# Allegro board TinySDK-1312B-PCB.brd
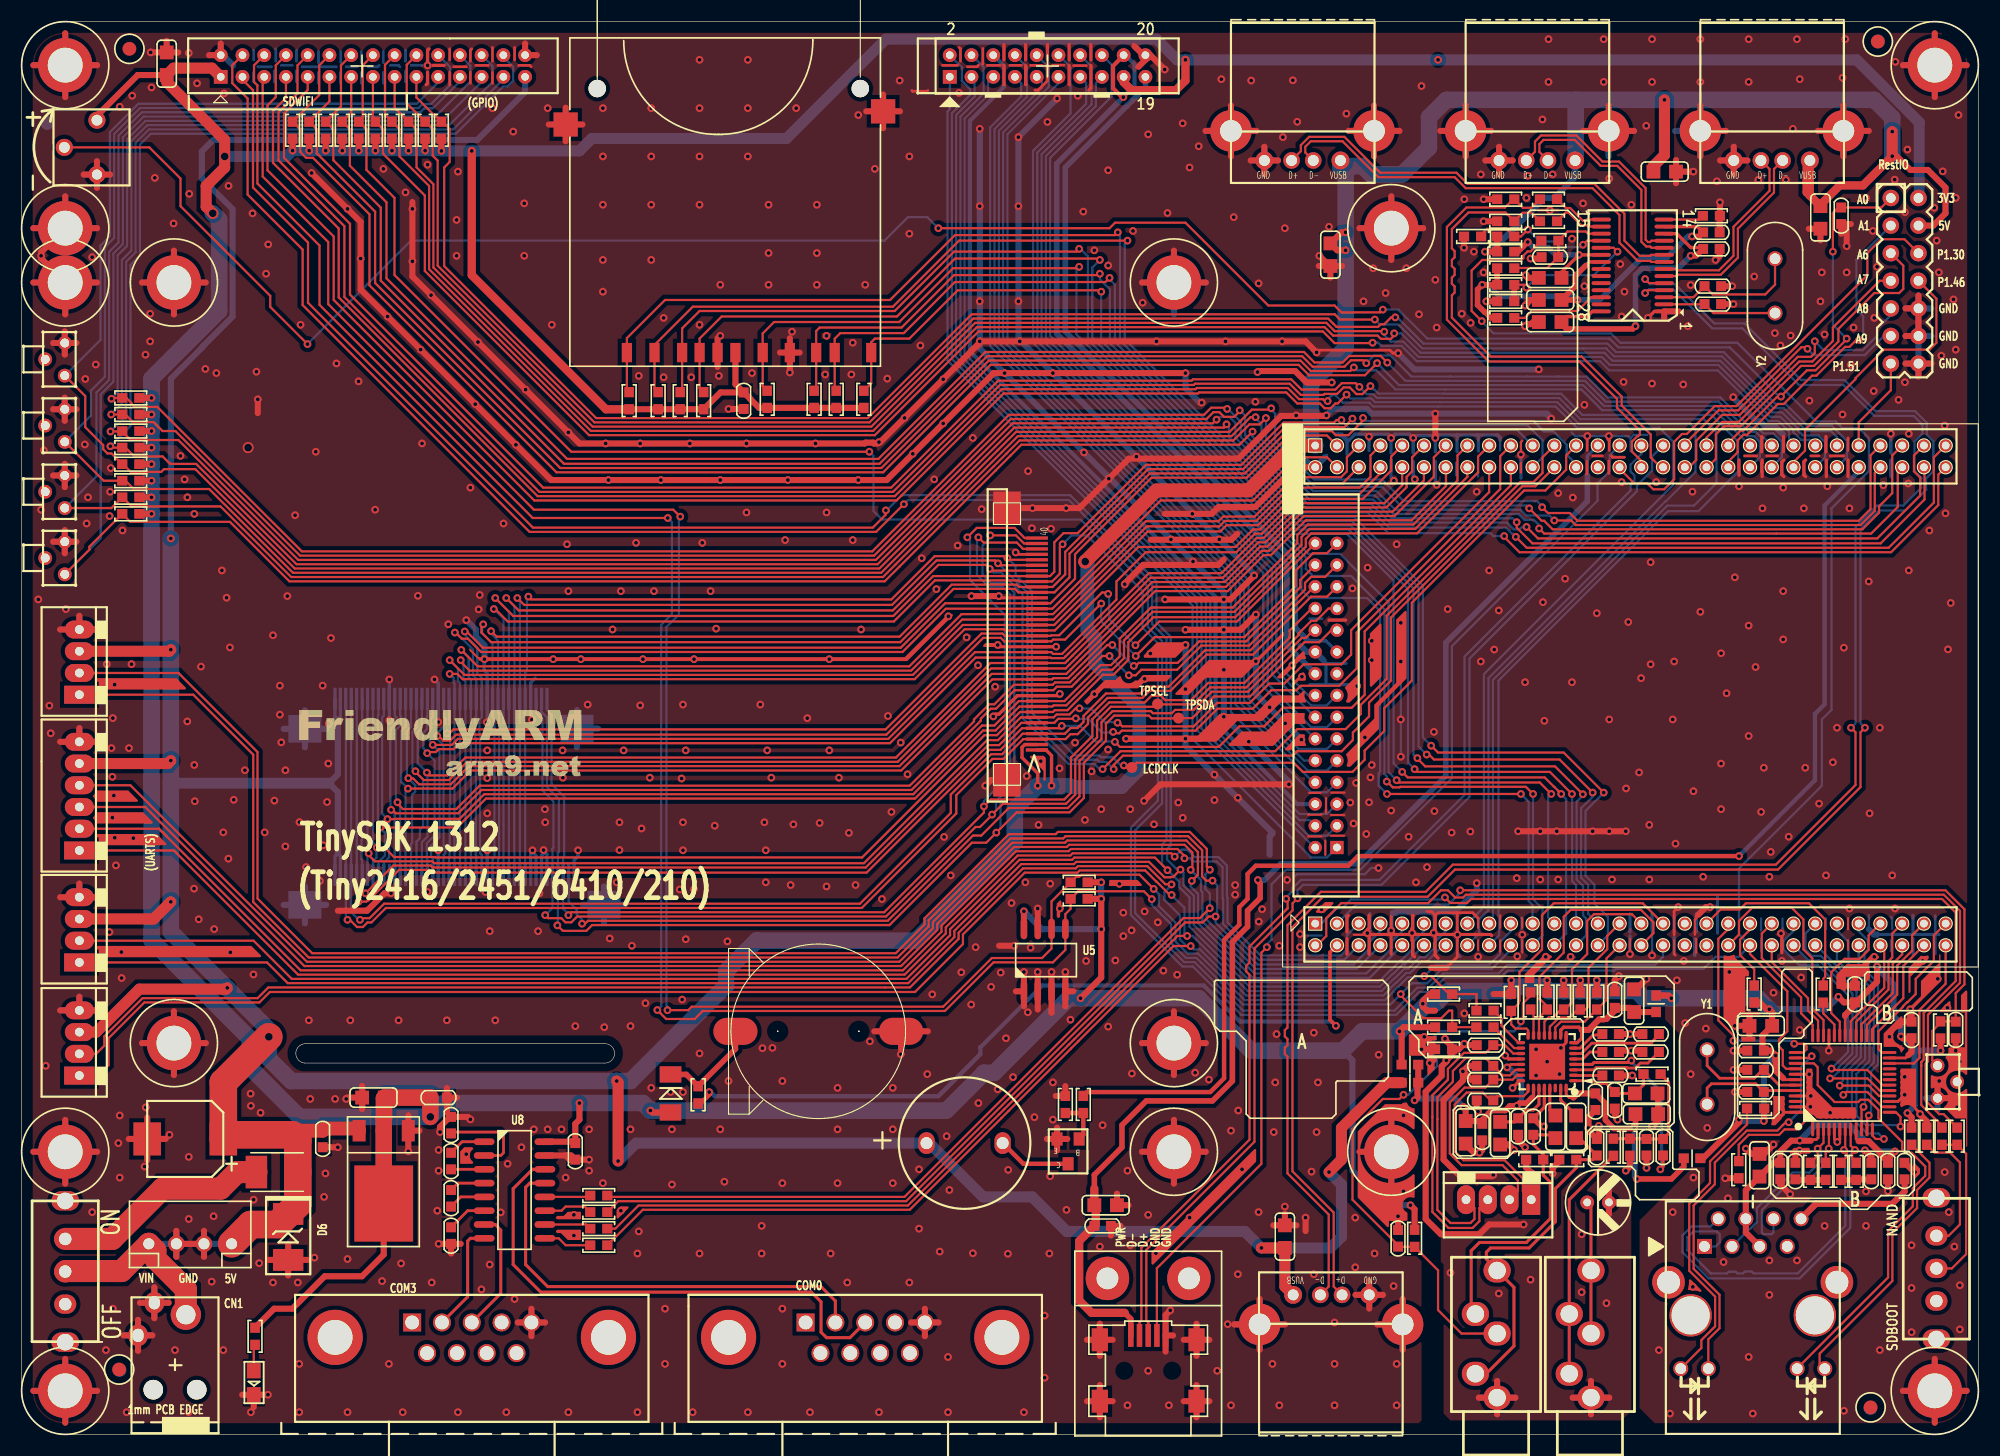
[diagram p0: board, top side]
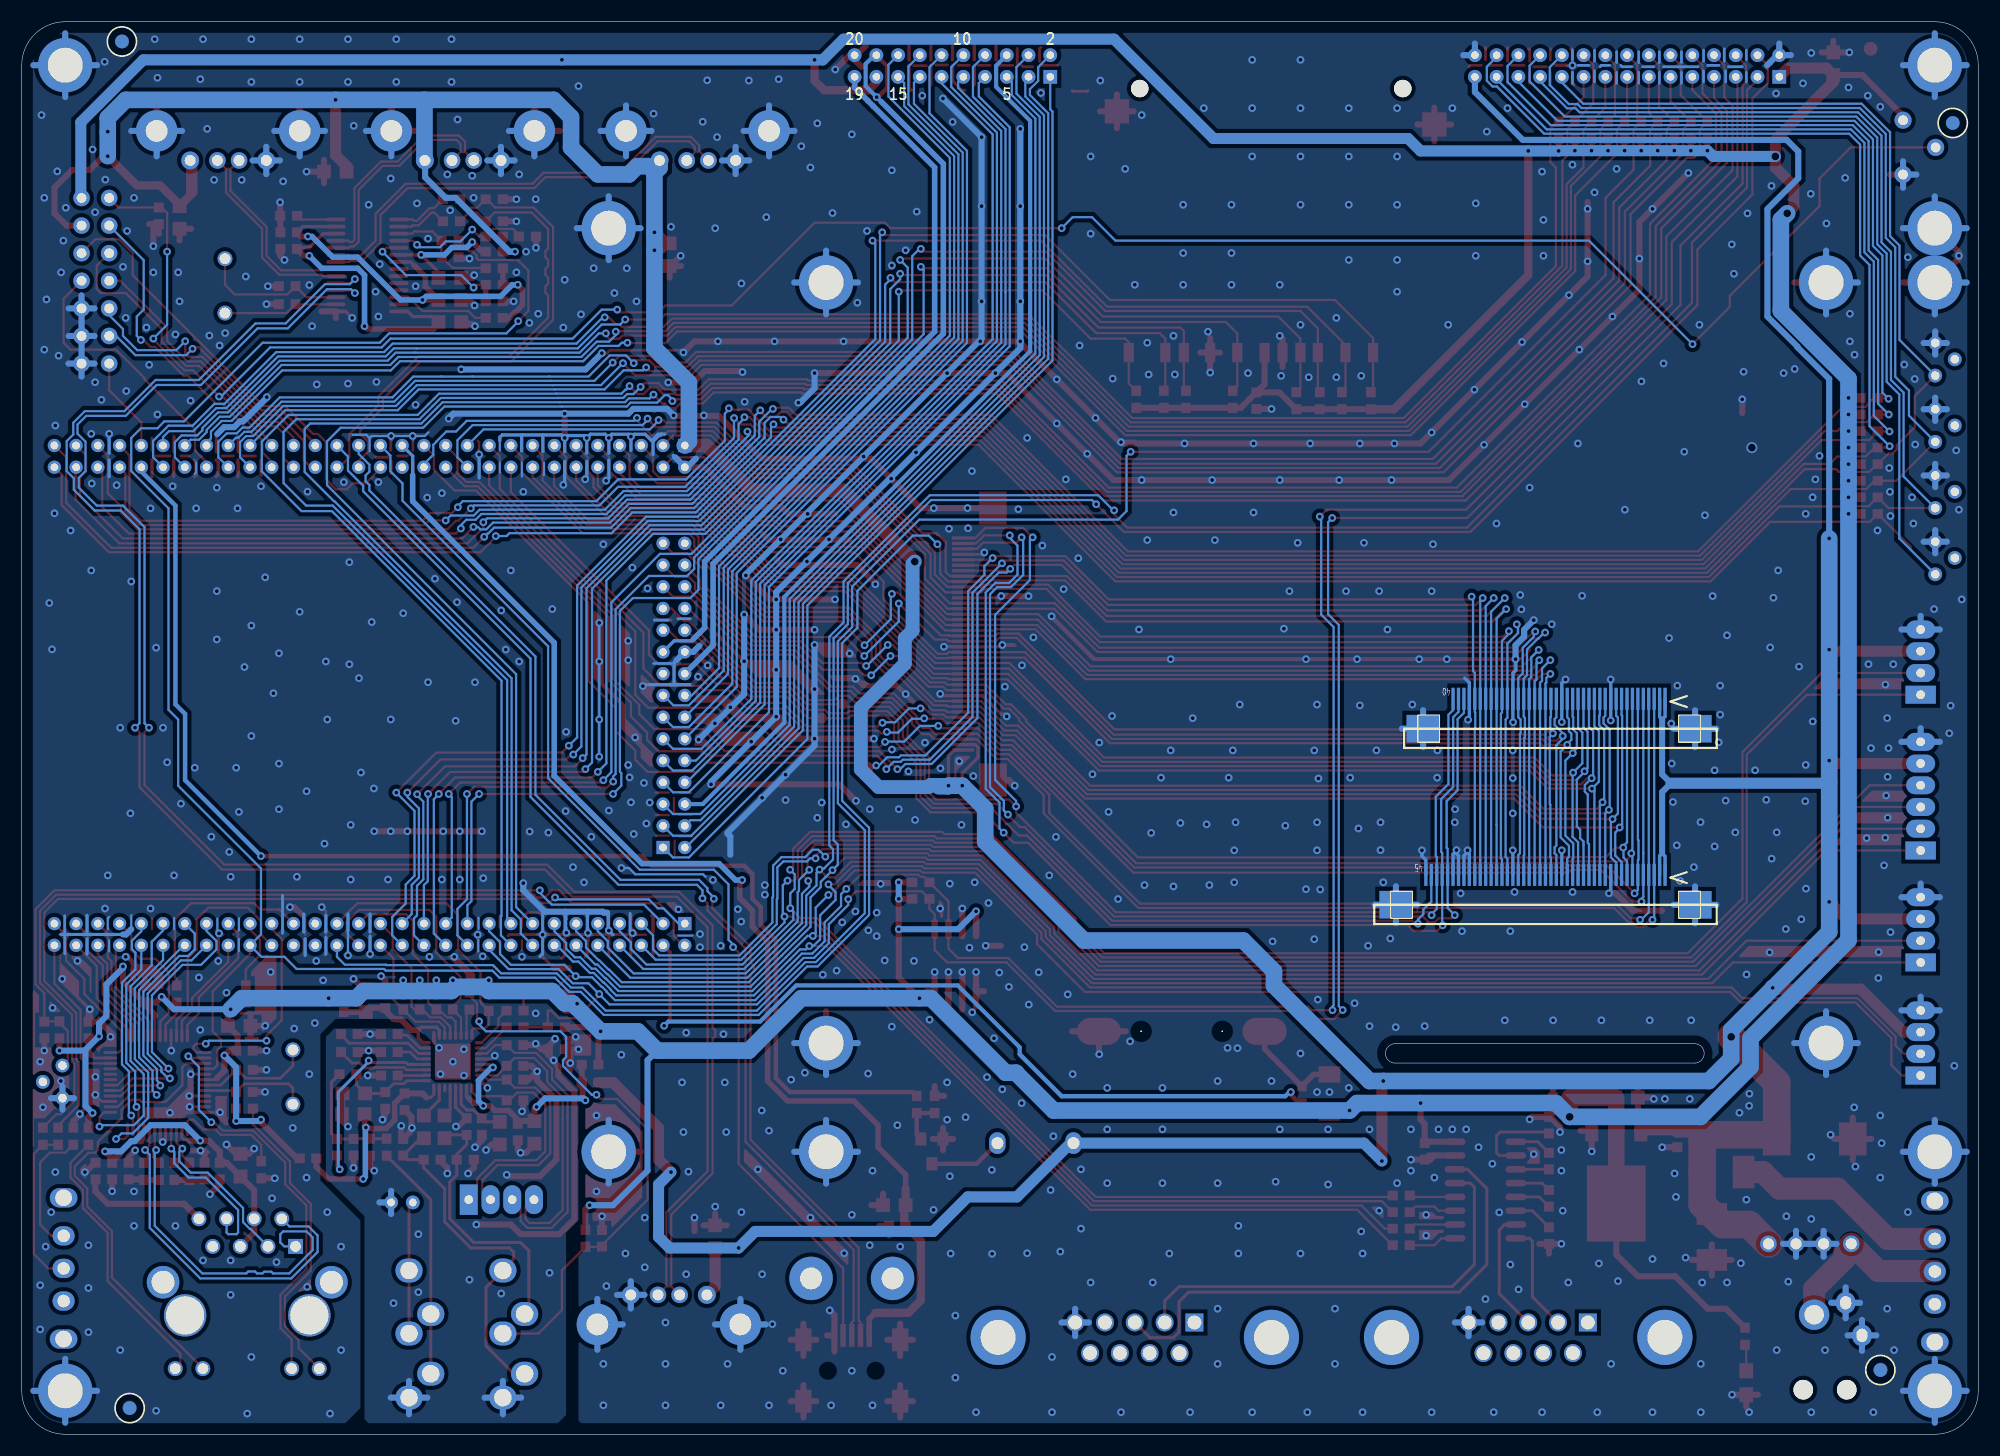
[diagram p1: board, bottom side, seen from below]

Outline 180 x 130 mm; copper layers: TOP, BOTTOM. Coordinates in mm from the lower left corner of the outline.
Outline path: 0,126 0,4 arc(1.17,1.17) 4,0 176,0 arc(178.83,1.17) 180,4 180,126 arc(178.83,128.83) 176,130 4,130 arc(1.17,128.83) 0,126 ; 26.01,35.94 53.57,35.94 arc(54.54,35.05) 53.57,34.16 26.01,34.16 arc(25.21,35.05) 26.01,35.94

## Design rules (mm)
net group DIFFPAIR38: nets XUHDM XUHDP
net group DIFFPAIR39: nets DM2- DP2+
net group DIFFPAIR40: nets DM3- DP3+
net group DIFFPAIR41: nets DM4- DP4+
net group DIFFPAIR42: nets N9742255 N9742303
net group DIFFPAIR51: nets SPK_OUT_RN SPK_OUT_RP
net group DIFFPAIR52: nets SPK_OUT_LN SPK_OUT_LP
net group PWR_PH: nets GND VDD_5V

## Placement (name value [footprint] x y rotation side)
BAT1  3V-Battery  [BAT600]  65.66 37.08 90 top
BUZZER1  Buzzer  [SPEAKER]  83.49 26.8 0 top
C8  220uF/16V  [CAPSOP]  18.54 27.18 180 top
C9  104  [C0603]  27.69 27.94 270 top
C10  10uF  [C0805]  33.4 30.99 180 top
C11  104  [C0603]  37.59 30.99 0 top
C12  104  [C0603]  177.93 37.97 270 top
C15  10uF  [C0805]  161.04 37.59 180 top
C16  104  [C0603]  173.86 36.45 90 top
C17  104  [C0603]  168.66 39.75 90 top
C18  104  [C0603]  160.27 35.31 180 top
C19  15pF  [C0603]  160.28 33.54 180 top
C20  15pF  [C0603]  160.28 31.51 180 top
C21  104  [C0603]  173.21 24.99 270 top
C22  10uF  [C0805]  159.88 23.72 90 top
C23  104  [C0603]  171.69 24.99 270 top
C24  104  [C0603]  161.78 24.99 270 top
C25  104  [C0603]  170.16 23.46 90 top
C26  104  [C0603]  163.18 23.46 90 top
C29  104  [C0603]  134.37 28.57 270 top
C30  10uF  [C0805]  132.84 28.83 270 top
C31  104  [C0603]  144.78 31.37 270 top
C32  10uF  [C0805]  148.46 29.46 0 top
C33  100pF  [C0603]  139.06 27.56 90 top
C34  100pF  [C0603]  144.91 25.65 90 top
C35  104  [C0603]  126.62 17.27 90 top
C36  1uF  [C0603]  151 27.18 270 top
C37  100pF  [C0603]  135.38 30.73 180 top
C38  100pF  [C0603]  135.38 32.64 180 top
C39  104  [C0603]  39.5 24.38 90 top
C40  104  [C0603]  39.5 29.21 270 top
C41  220pF  [C0603]  149.48 27.18 270 top
C42  1uF  [C0603]  149.1 35.18 0 top
C43  1uF  [C0603]  145.41 35.18 0 top
C44  1uF  [C0603]  145.41 33.02 0 top
C45  1uF  [C0603]  145.41 36.83 0 top
C46  1uF  [C0603]  150.62 36.83 180 top
C47  100pF  [C0603]  135.38 33.91 180 top
C48  100pF  [C0603]  135.38 35.81 180 top
C49  104  [C0603]  39.5 17.53 90 top
C50  104  [C0603]  146.56 39.24 90 top
C51  10uF  [C0805]  98.68 21.08 0 top
C52  104  [C0603]  98.68 19.18 0 top
C54  10uF  [C0805]  148.34 38.86 90 top
C55  10uF  [C0805]  143 29.34 270 top
C56  10uF  [C0805]  141.1 29.34 270 top
C57  10uF  [C0805]  136.02 26.67 90 top
C58  104  [C0603]  137.67 29.08 270 top
C59  10uF  [C0805]  150.5 31.37 180 top
C60  104  [C0603]  146.56 31.5 270 top
C61  104  [C0603]  39.5 22.48 270 top
C62  104  [C0603]  66.42 94.36 90 top
C64  104  [C0603]  167.39 112.9 270 top
C67  10uF  [C0805]  13.34 125.09 90 top
C68  104  [C0603]  50.93 26.8 270 top
C73  10uF  [C0805]  165.48 113.03 270 top
C74  10uF  [C0805]  120.4 109.6 270 top
C96  10uF  [C0805]  150.11 116.2 0 top
C97  10uF  [C0805]  116.21 17.15 90 top
C137  NC  [C0603]  154.81 104.01 0 top
C142  NC  [C0603]  154.81 105.66 0 top
C145  10uF  [C0805]  139.57 102.36 0 top
C146  104  [C0603]  156.21 109.09 180 top
C147  10uF  [C0805]  139.57 106.43 0 top
C153  10uF  [C0805]  139.57 104.39 0 top
C161  104  [C0603]  156.21 110.62 180 top
C162  104  [C0603]  141.35 108.33 180 top
CAMERA  SIP-2.0mm-10x2  [SDWIFI-NH]  94.38 125.93 0 top
CN1  -  [DC023B]  14.1 6.35 90 top
COM0  CONNECTOR DB9  [DB9RA_M]  77.6 10.29 90 top
COM3  CONNECTOR DB9  [DB9RA_M]  41.4 10.29 90 top
CON1  PH-4A  [SIP4-FA2]  5.3 66.98 90 top
CON2  PH-6A  [SIP6-FA2]  5.3 58.73 90 top
CON3  PH-4A  [SIP4-FA2]  5.3 42.35 90 top
CON4  PH-4A  [SIP4-FA2]  5.3 31.93 90 top
CON5  2510-4A  [CON4-B]  15.5 17.53 180 top
CON6  SIP-2.54mm-7x4  [SIP7X2-2]  173.23 106.16 270 top
CON10  SD/MMC CARD  [SDCARD]  58.05 118.1 90 top
CON12  PH-4A  [SIP4-FA]  139.96 21.59 180 top
CON13  SIP-2.0mm-15x2  [SIP30S]  27.31 125.93 0 top
D1  1N4148  [D1206]  59.68 29.61 90 top
D6  5.6V  [DO-214AA-SMB]  24.51 18.16 270 top
F1  3A  [F3528]  23.62 24.38 0 top
FB1  0R/NC  [L0603]  127.71 34.02 0 top
FB2  0R  [L0603]  153.67 25.4 180 top
FB3  0R  [L0603]  127.71 32.36 0 top
FB5  0R  [L0603]  150.37 39.62 270 top
H1  One-Hole  [H1]  4 4 0 top
H2  One-Hole  [H1]  4 126 0 top
H3  One-Hole  [H1]  176 126 0 top
H4  One-Hole  [H1]  176 4 0 top
H5  One-Hole  [H1]  4 26 0 top
H6  One-Hole  [H1]  106 26 0 top
H7  One-Hole  [H1]  4 106 0 top
H8  One-Hole  [H1]  4 111 0 top
H9  One-Hole  [H1]  14 36 0 top
H10  One-Hole  [H1]  14 106 0 top
H11  One-Hole  [H1]  106 36 0 top
H12  One-Hole  [H1]  126 26 0 top
H13  One-Hole  [H1]  106 106 0 top
H14  One-Hole  [H1]  126 111 0 top
ID1  ID-BOARD  [FM4P]  9 5.91 180 bottom
ID2  ID-BOARD  [FM4P]  170.76 128.18 0 top
ID3  ID-BOARD  [FM4P]  170.78 128.18 180 bottom
ID4  ID-BOARD  [FM4P]  170.09 2.48 0 top
ID5  ID-BOARD  [FM4P]  2.34 120.68 180 bottom
ID6  ID-BOARD  [FM4P]  9.91 127.51 0 top
ID7  ID-BOARD  [FM4P]  170.07 2.41 180 bottom
ID8  ID-BOARD  [FM4P]  8.96 5.96 0 top
K1  -  [KEY-A06]  2.16 98.93 270 top
K2  -  [KEY-A06]  2.16 92.84 270 top
K3  -  [KEY-A06]  2.16 86.74 270 top
K4  -  [KEY-A06]  2.16 80.64 270 top
LAN1  -  [HR911105A]  159.26 21.44 180 top
LCD1  FPC-P05-45P  [CON-FPC-P05-45P]  25.65 52.45 0 bottom
LCD2  FPC-P05-40P  [CON-FPC-P05-40P]  94.36 59.82 90 top
LCD3  FPC-P05-40P  [CON-FPC-P05-40P]  25.65 68.66 0 bottom
LCDCLK  Test-Point  [TPC1]  102.13 61.37 0 top
LED_3.3  RED  [LED]  21.34 5.84 270 top
MIC1  MIC  [MIC2]  144.02 21.34 0 top
MIC2  PhoneJack-Blue  [EARJACK5]  144.27 16.24 270 top
MINIUSB1  MiniUSB-AR  [MINIUSB_ANT]  103.63 5.84 0 top
NOREF  -  []  24.9 59.75 0 top
Q2  MMBT3904AL  [SOT-23-Q]  96.27 26.04 180 top
R1  0R  [R0603]  176.66 27.43 90 top
R2  0R  [R0603]  178.05 27.43 270 top
R3  0R  [R0603]  175.26 27.43 270 top
R4  1K  [R0603]  21.46 9.02 270 top
R5  10K  [R0603]  159.38 40.51 270 top
R6  1K  [R0603]  97.66 30.35 90 top
R7  0R  [R0603]  165.74 40.51 90 top
R8  6.8K,1%  [R0603]  157.97 24.35 270 top
R9  10K  [R0603]  97.28 50.8 180 top
R10  10K  [R0603]  97.28 49.28 180 top
R11  0R  [R0603]  62.23 31.24 270 top
R12  10K  [R0603]  26.44 120.02 270 top
R13  10K  [R0603]  29.49 120.02 270 top
R14  10K  [R0603]  32.54 120.02 270 top
R15  10K  [R0603]  176.53 37.21 270 top
R16  10K  [R0603]  96.01 30.35 270 top
R18  10K  [R0603]  35.59 120.02 270 top
R19  10K  [R0603]  38.61 120.02 270 top
R20  1K  [R0603]  159.51 29.98 180 top
R21  1K  [R0603]  173.86 27.43 270 top
R23  10K  [R0603]  27.97 120.02 90 top
R24  51R  [R0603]  167.37 24.2 270 top
R25  51R  [R0603]  168.77 24.2 270 top
R26  51R  [R0603]  164.57 24.2 270 top
R27  10K  [R0603]  24.92 120.02 90 top
R28  10K  [R0603]  31.01 120.02 90 top
R29  51R  [R0603]  165.97 24.2 270 top
R34  10K  [R0603]  34.06 120.02 90 top
R35  10K  [R0603]  10.03 89.28 0 top
R37  10K  [R0603]  10.03 87.76 0 top
R38  10K  [R0603]  58.55 95.12 270 top
R39  10K  [R0603]  10.03 86.23 0 top
R40  10K  [R0603]  10.03 84.71 0 top
R41  10K  [R0603]  68.58 95.25 270 top
R42  10K  [R0603]  60.58 95.12 270 top
R43  10K  [R0603]  10.03 95.38 180 top
R46  10K  [R0603]  142.24 25.27 0 top
R47  10K  [R0603]  139.19 25.27 0 top
R49  100K  [R0603]  128.14 18.03 90 top
R57  0R  [R0603]  134.62 38.99 0 top
R58  0R  [R0603]  134.62 37.47 0 top
R59  2.2K  [R0603]  149.99 33.15 180 top
R60  10K  [R0603]  37.11 120.02 90 top
R62  47K/NC  [R0603]  147.96 26.42 90 top
R63  0R  [R0603]  130.81 35.43 0 top
R64  10K  [R0603]  10.03 93.85 180 top
R65  10K  [R0603]  10.03 92.33 180 top
R66  10K  [R0603]  10.03 90.81 180 top
R67  100R  [R0603]  146.43 26.42 90 top
R71  10K  [R0603]  62.74 95.12 270 top
R72  10K  [R0603]  74.93 95.25 270 top
R73  10K  [R0603]  72.9 95.25 270 top
R74  10K  [R0603]  55.88 95.12 270 top
R75  0R  [R0603]  53.09 20.45 0 top
R76  0R  [R0603]  53.09 21.97 0 top
R77  10K  [R0603]  77.47 95.25 270 top
R78  0R  [R0603]  53.09 18.92 0 top
R79  0R  [R0603]  53.09 17.4 0 top
R92  0R  [R0603]  138.81 39.88 270 top
R103  2.7K,1%  [R0603]  155.45 112.14 0 top
R104  0R  [R0603]  140.46 111.63 180 top
R105  0R  [R0603]  140.46 113.67 180 top
R106  NC  [R0603]  140.59 109.86 180 top
R107  100K  [R0603]  136.53 107.31 180 top
R108  10K  [R0603]  136.53 110.24 0 top
R109  15K  [R0603]  136.53 113.67 0 top
R110  15K  [R0603]  136.53 111.63 0 top
R111  20K  [R0603]  133.48 110.24 180 top
R114  10K  [R0603]  136.53 105.79 0 top
R115  NC  [R0603]  136.53 104.27 180 top
R116  10K  [R0603]  136.53 102.74 180 top
R117  0R  [R0603]  136.53 108.84 180 top
R126  2.2K  [R0603]  130.81 37.47 180 top
R127  2.2K  [R0603]  130.81 40.51 180 top
R128  10K  [R0603]  137.03 39.75 90 top
R129  10K  [R0603]  140.34 39.88 90 top
R131  10K  [R0603]  141.86 39.88 90 top
R132  10K  [R0603]  143.38 39.88 90 top
R133  10K  [R0603]  144.91 39.88 90 top
RST  -  [KEY-A06]  178.05 32.44 90 top
S1  SW-DIP4  [SW35]  4 15 270 top
S2  SW-DIP4  [SW35]  176.15 15.24 90 top
SPK1  PhoneJack-Green  [EARJACK5]  135.64 16.24 270 top
TINYBOARD  TinyCore  [TINY6410_2]  116 43 0 top
TPSCL  Test-Point  [TPC1]  104.5 67.21 0 top
TPSDA  Test-Point  [TPC1]  106.43 65.91 0 top
U2  AMS1086CM-3.3  [TO-252]  35.56 27.94 180 top
U4  DM9000AEP  [LQFP48FA]  167.51 32.38 0 top
U5  AT24LC04  [SOP8]  92.2 40.77 90 top
U6  WM8960GEFL  [QFN32-19P7-TH]  140.34 34.29 180 top
U8  SP3232  [SOP16]  42.55 26.92 0 top
U52  FE1.1s  [TSSOP28-25P6X228]  148.21 107.57 90 top
USBH1  USB  A  [USB-A2]  164.5 117.23 0 top
USBH2  USB  A  [USB-A2]  142.91 117.23 0 top
USBH3  USB  A  [USB-A2]  116.97 12.83 180 top
USBH4  USB  A  [USB-A2]  121.32 117.23 0 top
W1  10K  [VR3_7X7]  5.92 117.3 90 top
Y1  25MHz  [OSC2PR-1]  155.06 35.32 270 top
Y2  12MHz  [OSC2PR-1]  161.3 103.25 90 top

## Library data of the parts
BAT1 = BATTERY_3
BUZZER1 = SPEAKER
C8 C10 C15 C22 C51 C67 = CAP
C9 C11 C12 C16-C21 C23-C26 C29-C50 C52 C54-C62 C64 C68 C73 C74 C96 C97 C137 C142 C145-C147 C153 C161 C162 = CAP NP
CAMERA = CON20A
CN1 = CON3_3
COM0 COM3 = CONNECTOR DB9_2
CON1 CON3-CON5 = CON4
CON2 = CON6
CON6 = CON14A
CON10 = SD_0
CON12 = J1X4_1
CON13 = CON20A_5
D1 = DIODE
D6 = DIODE ZENER1_8
F1 = FUSE
FB1-FB3 FB5 = INDUCTOR
H1-H14 = CON1
ID1-ID8 = ID-BOARD
K1-K4 RST = SW PUSHBUTTON_0
LAN1 = HR911105A
LCD1 = LCD-888_1
LCD2 LCD3 = LCD-888_2
LCDCLK TPSCL TPSDA = TP
LED_3.3 = LED
MIC1 = MIC
MIC2 SPK1 = PHONEJACK STEREO SW
MINIUSB1 = USB_A/B_2
Q2 = NPN-BEC
R1-R16 R18-R21 R23-R29 R34 R35 R37-R43 R46 R47 R49 R57-R60 R62-R67 R71-R79 R92 R103-R111 R114-R117 R126-R129 R131-R133 = R
S1 S2 = CON5
TINYBOARD = TinyCore
U2 = AMS1117
U4 = DM9000AEP
U5 = AT24LC04
U6 = WM8960GEFL_0
U8 = SP3232
U52 = CON28C_1
USBH1-USBH4 = USBPORT_0
W1 = RESISTOR VAR_0
Y1 Y2 = CRYSTAL

## Footprints (pads in the part's own frame, mm; a bottom-side part is the same pattern mirrored in y, then rotated)
BAT600
  oval 2.489x4.064 smd: 1(0,0) 2(0,-15.24)
  round 0.127 hole 1.194: 3(0,-3.886) 4(0,-11.354)
C0603
  rect 0.914x0.914 smd: 1(0,0) 2(1.524,0)
C0805
  rect 1.27x1.27 smd: 1(0,0) 2(2.083,0)
CAPSOP
  rect 2.54x3.048 smd: 1(0,0) 2(7,0)
CON4-B
  round 1.524 hole 1.016: 1(-3.81,0) 2(-1.27,0) 3(1.27,0) 4(3.81,0)
CON-FPC-P05-40P
  rect 0.305x2.032 smd: 1(3.16,0.968) 2(3.66,0.968) 3(4.16,0.968) 4(4.66,0.968) 5(5.16,0.968) 6(5.66,0.968) 7(6.161,0.968) 8(6.661,0.968) 9(7.161,0.968) 10(7.661,0.968) 11(8.161,0.968) 12(8.661,0.968) 13(9.161,0.968) 14(9.661,0.968) 15(10.162,0.968) 16(10.662,0.968) 17(11.162,0.968) 18(11.662,0.968) 19(12.162,0.968) 20(12.662,0.968) 21(13.162,0.968) 22(13.662,0.968) 23(14.163,0.968) 24(14.663,0.968) 25(15.163,0.968) 26(15.663,0.968) 27(16.163,0.968) 28(16.663,0.968) 29(17.163,0.968) 30(17.663,0.968) 31(18.164,0.968) 32(18.664,0.968) 33(19.164,0.968) 34(19.664,0.968) 35(20.164,0.968) 36(20.664,0.968) 37(21.164,0.968) 38(21.664,0.968) 39(22.165,0.968) 40(22.665,0.968)
  rect 3.048x2.54 smd: A(0.399,3.726) B(25.42,3.713)
CON-FPC-P05-45P
  rect 0.305x2.032 smd: 1(3.16,0.968) 2(3.66,0.968) 3(4.16,0.968) 4(4.66,0.968) 5(5.16,0.968) 6(5.66,0.968) 7(6.16,0.968) 8(6.661,0.968) 9(7.161,0.968) 10(7.661,0.968) 11(8.161,0.968) 12(8.661,0.968) 13(9.161,0.968) 14(9.661,0.968) 15(10.161,0.968) 16(10.662,0.968) 17(11.162,0.968) 18(11.662,0.968) 19(12.162,0.968) 20(12.662,0.968) 21(13.162,0.968) 22(13.662,0.968) 23(14.163,0.968) 24(14.663,0.968) 25(15.163,0.968) 26(15.663,0.968) 27(16.163,0.968) 28(16.663,0.968) 29(17.163,0.968) 30(17.663,0.968) 31(18.163,0.968) 32(18.664,0.968) 33(19.164,0.968) 34(19.664,0.968) 35(20.164,0.968) 36(20.664,0.968) 37(21.164,0.968) 38(21.664,0.968) 39(22.164,0.968) 40(22.665,0.968) 41(23.165,0.968) 42(23.665,0.968) 43(24.165,0.968) 44(24.665,0.968) 45(25.165,0.968)
  rect 3.048x2.54 smd: A(0.399,3.726) B(27.92,3.714)
D1206
  rect 1.5x2 smd: 1(0.009,-0.006) 2(3.51,-0.006)
DB9RA_M
  rect 1.651x1.651 hole 1.27: 1(0,5.486)
  round 1.651 hole 1.27: 2(0,2.743) 3(0,0) 4(0,-2.743) 5(0,-5.486) 6(-2.819,4.115) 7(-2.819,1.372) 8(-2.819,-1.372) 9(-2.819,-4.115)
  round 5.08 hole 3.2: 10(-1.372,12.573) 11(-1.372,-12.573)
DC023B
  round 1.803 hole 1.803 unplated: (-2.25,2) (-2.25,-2)
  round 2.794 hole 1.778: 1(4.65,-1)
  oval 1.981x1.778 hole 1.219x1.016: 2(5.75,1.9) 3(2.75,3.4)
DO-214AA-SMB
  rect 2.007x2.794 smd: 1(2.115,0) 2(-2.115,0)
EARJACK5
  oval 2.2x2.5 hole 1.6: 1(5.17,-1.903) 2(6.97,0.097) 3(1.17,0.097) 4(10.67,-1.903) 5(12.87,0.097)
F3528
  rect 1.981x2.997 smd: 1(-2.032,-0.254) 2(1.778,-0.254)
FM4P
  round 1.27 smd: 1(0,0)
H1
  round 5 hole 3.2: 1(0,0)
HR911105A
  round 3.9 hole 3.5 unplated: (-5.707,10.498) (5.723,10.498)
  rect 1.372x1.372 hole 0.991: 1(4.453,4.148)
  round 1.372 hole 0.991: 2(3.183,1.608) 3(1.913,4.148) 4(0.643,1.608) 5(-0.627,4.148) 6(-1.897,1.608) 7(-3.167,4.148) 8(-4.437,1.608) 9(6.633,15.398) 10(4.093,15.398) 11(-4.077,15.398) 12(-6.617,15.398)
  round 2.997 hole 2.1: M3(-7.737,7.448) M4(7.753,7.448)
KEY-A06
  round 1.27 hole 0.787: 1(1.5,1.8) 2(-1.5,1.8) 3(0,0)
L0603
  rect 0.94x0.889 smd: 1(-0.762,0) 2(0.762,0)
LED
  rect 1.4x1.27 smd: 1(-0.002,0.008) 2(2.207,0.008)
LQFP48FA
  oval 0.279x1.27 smd: 1(-2.75,-4.327) 2(-2.25,-4.327) 3(-1.75,-4.327) 4(-1.25,-4.327) 5(-0.75,-4.327) 6(-0.25,-4.327) 7(0.25,-4.327) 8(0.75,-4.327) 9(1.25,-4.327) 10(1.75,-4.327) 11(2.25,-4.327) 12(2.75,-4.327) 25(2.75,4.327) 26(2.25,4.327) 27(1.75,4.327) 28(1.25,4.327) 29(0.75,4.327) 30(0.25,4.327) 31(-0.25,4.327) 32(-0.75,4.327) 33(-1.25,4.327) 34(-1.75,4.327) 35(-2.25,4.327) 36(-2.75,4.327)
  oval 1.27x0.279 smd: 13(4.327,-2.75) 14(4.327,-2.25) 15(4.327,-1.75) 16(4.327,-1.25) 17(4.327,-0.75) 18(4.327,-0.25) 19(4.327,0.25) 20(4.327,0.75) 21(4.327,1.25) 22(4.327,1.75) 23(4.327,2.25) 24(4.327,2.75) 37(-4.327,2.75) 38(-4.327,2.25) 39(-4.327,1.75) 40(-4.327,1.25) 41(-4.327,0.75) 42(-4.327,0.25) 43(-4.327,-0.25) 44(-4.327,-0.75) 45(-4.327,-1.25) 46(-4.327,-1.75) 47(-4.327,-2.25) 48(-4.327,-2.75)
MIC2
  round 1.27 hole 0.711: 1(0,0) 2(2,0)
MINIUSB_ANT
  round 4 hole 2 unplated: (-3.75,8.5) (3.75,8.5)
  round 0 hole 0.889 unplated: (-2.2,0) (2.2,0)
  rect 0.508x2.108 smd: 1(-1.6,3.25) 2(-0.8,3.25) 3(0,3.25) 4(0.8,3.25) 5(1.6,3.25)
  rect 1.499x2.108 smd: 6(4.45,2.85) 7(-4.45,2.85) 8(-4.45,-2.8) 9(4.45,-2.8)
OSC2PR-1
  round 1.372 hole 0.991: 1(-0.064,0) 2(4.94,0)
QFN32-19P7-TH
  oval 0.813x0.305 smd: 1(-2.425,1.75) 2(-2.425,1.25) 3(-2.425,0.75) 4(-2.425,0.25) 5(-2.425,-0.25) 6(-2.425,-0.75) 7(-2.425,-1.25) 8(-2.425,-1.75) 17(2.425,-1.75) 18(2.425,-1.25) 19(2.425,-0.75) 20(2.425,-0.25) 21(2.425,0.25) 22(2.425,0.75) 23(2.425,1.25) 24(2.425,1.75)
  oval 0.305x0.813 smd: 9(-1.75,-2.425) 10(-1.25,-2.425) 11(-0.75,-2.425) 12(-0.25,-2.425) 13(0.25,-2.425) 14(0.75,-2.425) 15(1.25,-2.425) 16(1.75,-2.425) 25(1.75,2.425) 26(1.25,2.425) 27(0.75,2.425) 28(0.25,2.425) 29(-0.25,2.425) 30(-0.75,2.425) 31(-1.25,2.425) 32(-1.75,2.425)
  rect 3.302x3.302 smd: G1(0,0)
R0603
  rect 0.94x0.889 smd: 1(-0.787,0) 2(0.787,0)
SDCARD
  round 1.6 hole 1.6 unplated: (5.748,5.104) (5.748,-19.095)
  rect 1.778x0.94 smd: 1(-18.552,-0.168) 2(-18.552,-2.708) 3(-18.552,-5.967) 4(-18.552,-7.612) 5(-18.552,-10.119) 6(-18.552,-12.619) 7(-18.552,-15.039) 8(-18.552,-16.744) 9(-18.552,2.372) 10(-18.552,-20.104) 11(-18.552,-4.316)
  rect 2.235x2.235 smd: 12(2.438,8.009) 13(3.652,-21.199)
SDWIFI-NH
  rect 1.27x1.27 hole 0.7: 1(-9,-1)
  round 1.27 hole 0.7: 2(-9,1) 3(-7,-1) 4(-7,1) 5(-5,-1) 6(-5,1) 7(-3,-1) 8(-3,1) 9(-1,-1) 10(-1,1) 11(1,-1) 12(1,1) 13(3,-1) 14(3,1) 15(5,-1) 16(5,1) 17(7,-1) 18(7,1) 19(9,-1) 20(9,1)
SIP4-FA
  rect 1.651x2.8 hole 0.8: 1(1.08,0)
  oval 1.651x2.667 hole 0.8: 2(3.08,0) 3(5.08,0) 4(7.08,0)
SIP4-FA2
  rect 1.651x2.8 hole 0.8: 1(1.08,0)
  oval 1.651x2.667 hole 0.8: 2(3.08,0) 3(5.08,0) 4(7.08,0)
SIP6-FA2
  rect 1.651x2.8 hole 0.8: 1(-5,0)
  oval 1.651x2.667 hole 0.8: 2(-3,0) 3(-1,0) 4(1,0) 5(3,0) 6(5,0)
SIP7X2-2
  round 1.524 hole 0.889: 1(-7.62,-1.27) 2(-7.62,1.27) 3(-5.08,-1.27) 4(-5.08,1.27) 5(-2.54,-1.27) 6(-2.54,1.27) 7(0,-1.27) 8(0,1.27) 9(2.54,-1.27) 10(2.54,1.27) 11(5.08,-1.27) 12(5.08,1.27) 13(7.62,-1.27) 14(7.62,1.27)
SIP30S
  rect 1.27x1.27 hole 0.7: 1(-9,-1)
  round 1.27 hole 0.7: 2(-9,1) 3(-7,-1) 4(-7,1) 5(-5,-1) 6(-5,1) 7(-3,-1) 8(-3,1) 9(-1,-1) 10(-1,1) 11(1,-1) 12(1,1) 13(3,-1) 14(3,1) 15(5,-1) 16(5,1) 17(7,-1) 18(7,1) 19(9,-1) 20(9,1) 21(11,-1) 22(11,1) 23(13,-1) 24(13,1) 25(15,-1) 26(15,1) 27(17,-1) 28(17,1) 29(19,-1) 30(19,1)
SOP8
  oval 1.905x0.61 smd: 1(0,0) 2(0,-1.27) 3(0,-2.54) 4(0,-3.81) 5(5.74,-3.81) 6(5.74,-2.54) 7(5.74,-1.27) 8(5.74,0)
SOP16
  oval 1.905x0.61 smd: 1(0,0) 2(0,-1.27) 3(0,-2.54) 4(0,-3.81) 5(0,-5.08) 6(0,-6.35) 7(0,-7.62) 8(0,-8.89) 9(5.588,-8.89) 10(5.588,-7.62) 11(5.588,-6.35) 12(5.588,-5.08) 13(5.588,-3.81) 14(5.588,-2.54) 15(5.588,-1.27) 16(5.588,0)
SOT-23-Q
  rect 1.016x1.219 smd: B(-1.016,-1.143) C(0,1.143) E(1.016,-1.143)
SPEAKER
  oval 1.5x2 hole 1.1: 1(-0.254,0) 2(6.754,0)
SW35
  oval 1.778x2.54 hole 1.524: 1(-6.477,0) 5(6.523,0)
  oval 1.778x2.032 hole 1.143: 2(-2.977,0) 3(0.023,0) 4(3.023,0)
TINY6410_2
  rect 1.219x1.219 hole 0.711: A1(3,48) B1(3,4) C1(5,11)
  round 1.219 hole 0.711: A2(3,46) A3(5,48) A4(5,46) A5(7,48) A6(7,46) A7(9,48) A8(9,46) A9(11,48) A10(11,46) A11(13,48) A12(13,46) A13(15,48) A14(15,46) A15(17,48) A16(17,46) A17(19,48) A18(19,46) A19(21,48) A20(21,46) A21(23,48) A22(23,46) A23(25,48) A24(25,46) A25(27,48) A26(27,46) A27(29,48) A28(29,46) A29(31,48) A30(31,46) A31(33,48) A32(33,46) A33(35,48) A34(35,46) A35(37,48) A36(37,46) A37(39,48) A38(39,46) A39(41,48) A40(41,46) A41(43,48) A42(43,46) A43(45,48) A44(45,46) A45(47,48) A46(47,46) A47(49,48) A48(49,46) A49(51,48) A50(51,46) A51(53,48) A52(53,46) A53(55,48) A54(55,46) A55(57,48) A56(57,46) A57(59,48) A58(59,46) A59(61,48) A60(61,46) B2(3,2) B3(5,4) B4(5,2) B5(7,4) B6(7,2) B7(9,4) B8(9,2) B9(11,4) B10(11,2) B11(13,4) B12(13,2) B13(15,4) B14(15,2) B15(17,4) B16(17,2) B17(19,4) B18(19,2) B19(21,4) B20(21,2) B21(23,4) B22(23,2) B23(25,4) B24(25,2) B25(27,4) B26(27,2) B27(29,4) B28(29,2) B29(31,4) B30(31,2) B31(33,4) B32(33,2) B33(35,4) B34(35,2) B35(37,4) B36(37,2) B37(39,4) B38(39,2) B39(41,4) B40(41,2) B41(43,4) B42(43,2) B43(45,4) B44(45,2) B45(47,4) B46(47,2) B47(49,4) B48(49,2) B49(51,4) B50(51,2) B51(53,4) B52(53,2) B53(55,4) B54(55,2) B55(57,4) B56(57,2) B57(59,4) B58(59,2) B59(61,4) B60(61,2) C2(3,11) C3(5,13) C4(3,13) C5(5,15) C6(3,15) C7(5,17) C8(3,17) C9(5,19) C10(3,19) C11(5,21) C12(3,21) C13(5,23) C14(3,23) C15(5,25) C16(3,25) C17(5,27) C18(3,27) C19(5,29) C20(3,29) C21(5,31) C22(3,31) C23(5,33) C24(3,33) C25(5,35) C26(3,35) C27(5,37) C28(3,37) C29(5,39) C30(3,39)
TO-252
  rect 1.194x1.981 smd: 1(0,0) 2(2.261,0) 3(4.521,0)
  rect 5.41x7.01 smd: 4(2.261,6.706)
TPC1
  round 1 smd: 1(0,0)
TSSOP28-25P6X228
  oval 0.356x1.778 smd: 1(-4.227,-2.896) 2(-3.576,-2.896) 3(-2.926,-2.896) 4(-2.276,-2.896) 5(-1.626,-2.896) 6(-0.975,-2.896) 7(-0.325,-2.896) 8(0.325,-2.896) 9(0.975,-2.896) 10(1.626,-2.896) 11(2.276,-2.896) 12(2.926,-2.896) 13(3.576,-2.896) 14(4.227,-2.896) 15(4.227,2.896) 16(3.576,2.896) 17(2.926,2.896) 18(2.276,2.896) 19(1.626,2.896) 20(0.975,2.896) 21(0.325,2.896) 22(-0.325,2.896) 23(-0.975,2.896) 24(-1.626,2.896) 25(-2.276,2.896) 26(-2.926,2.896) 27(-3.576,2.896) 28(-4.227,2.896)
USB-A2
  round 1.651 hole 1: 1(0,0) 4(-7,0)
  round 1.524 hole 1: 2(-2.504,0) 3(-4.498,0)
  round 3.81 hole 2: 5(3.084,2.718) 6(-10.074,2.718)
VR3_7X7
  round 1.575 hole 0.9: 1(-1.36,-1) 2(3.64,-1) 3(1.14,2)

## Nets
AGND: C29.2 C30.2 C31.2 C32.2 C33.2 C34.2 C37.2 C38.2 C41.2 C42.1 C43.2 C44.2 C45.2 C46.2 C47.2 C48.2 C57.1 C58.2 C59.1 C60.2 MIC1.2 MIC2.5(E) R46.1 R47.1 R62.1 R63.2 SPK1.5(E) U6.20(SPKGND2) U6.24(SPKGND1) U6.28(AGND)
GND: BAT1.2(-) C8.2 C9.2 C10.2 C11.2 C12.2 C15.2 C16.2 C17.2 C18.2 C19.2 C20.2 C21.1 C22.2 C23.2 C24.2 C25.2 C26.2 C35.2 C40.1 C49.1 C50.2 C51.2 C52.2 C54.2 C62.1 C64.2 C67.2 C68.2 C73.2 C74.2 C96.2 C97.2 C137.2 C142.2 C145.1 C146.1 C147.1 C153.1 C161.1 C162.2 CAMERA.20 CN1.2 CN1.3 COM0.5 COM3.5 CON1.4 CON2.6 CON3.4 CON4.4 CON5.2 CON5.3 CON6.10 CON6.12 CON6.14 CON10.3(GND2) CON10.6(GND1) CON10.12(PAD1) CON10.13(PAD2) CON13.2 CON13.30 D6.1(A) H1.1 H2.1 H3.1 H4.1 H5.1 H6.1 H7.1 H8.1 H9.1 H10.1 H11.1 H12.1 H13.1 H14.1 K1.2 K2.2 K3.2 K4.2 LCD1.11(GND1) LCD1.20(GND2) LCD1.29(GND3) LCD1.37(GND4) LCD1.38(GND5) LCD1.39(GND6) LCD1.40(GND7) LCD1.45(GND8) LCD1.A LCD1.B LCD2.11(GND1) LCD2.20(GND2) LCD2.29(GND3) LCD2.37(SCL2) LCD2.A LCD2.B LCD3.11(GND1) LCD3.20(GND2) LCD3.29(GND3) LCD3.37(SCL2) LCD3.A LCD3.B LED_3.3.2(CATHODE) MINIUSB1.5(GND) MINIUSB1.6(#6) MINIUSB1.7(#7) MINIUSB1.8(#8) MINIUSB1.9(#9) Q2.E(EMITTER) R3.1 R8.2 R16.1 R63.1 R103.2 R109.1 R110.1 R111.2 R115.2 RST.2 TINYBOARD.A2 TINYBOARD.C20 U2.1(GND) U4.5(AGND2) U4.6(AGND3) U4.15(GND) U4.33(GND2) U4.41(TEST) U4.45(GND1) U4.47(AGND1) U4.48(BGGND) U5.1(A0) U5.2(A1) U5.3(A2) U5.4(GND) U5.7(WP) U6.9(DGND) U6.G1(GND_PADDLE) U8.15(VSS) U52.1(VSS) USBH1.4(GND1) USBH1.5(GND3) USBH1.6(GND2) USBH2.4(GND1) USBH2.5(GND3) USBH2.6(GND2) USBH3.4(GND1) USBH3.5(GND3) USBH3.6(GND2) USBH4.4(GND1) USBH4.5(GND3) USBH4.6(GND2) W1.1(A)
GND_EARTH: C21.2 LAN1.8(CHS_GND)
VBAT: BAT1.1(+) D1.2(K) R11.1
VDD_3.3V: C10.1 C11.1 C15.1 C16.1 C17.1 C18.1 C62.2 C67.1 C68.1 CAMERA.17 CON6.2 CON10.4(VDD) CON13.1 D1.1(A) FB1.1 FB2.1 FB5.1 R4.1 R5.2 R9.1 R10.1 R12.2 R13.2 R14.2 R15.2 R18.2 R19.2 R20.1 R21.1 R23.1 R27.1 R28.1 R34.1 R35.2 R37.2 R38.2 R39.2 R40.2 R41.2 R42.2 R43.1 R49.2 R60.1 R64.1 R65.1 R66.1 R71.2 R72.2 R73.2 R74.2 R77.2 R126.2 R127.2 R128.2 R129.2 R131.2 R132.2 R133.2 U2.2(VOUT) U2.4(TAB) U4.23(VDD1) U4.30(VDD2) U4.42(VDD3) U5.8(VDD) U8.16(VDD) W1.2(B)
VDD_5V: BUZZER1.1 C8.1 C9.1 C73.1 C74.1 C96.1 C97.1 CON1.3 CON2.5 CON3.3 CON4.3 CON5.1 CON6.4 CON13.29 D6.2(K) F1.2 FB3.1 LCD1.1(VDD5V_1) LCD1.2(VDD5V_2) LCD2.1(VDD5V_1) LCD2.2(VDD5V_2) LCD3.1(VDD5V_1) LCD3.2(VDD5V_2) R108.1 R117.2 TINYBOARD.A1 U2.3(VIN) USBH1.1(VBUS) USBH2.1(VBUS) USBH3.1(VBUS) USBH4.1(VBUS)
VDD_AUDIO_A3.3V: C31.1 C32.1 FB2.2 U6.32(AVDD)
VDD_AUDIO_D3.3V: C50.1 C54.1 FB5.2 U6.8(DCVDD) U6.10(DBVDD)
VDD_AUDIO_SPK: C29.1 C30.1 FB1.2 FB3.2 U6.21(SPKVDD2) U6.26(SPKVDD1)
VDD_CAM_1.8V: CAMERA.19 TINYBOARD.C19
VDD_CAM_2.5V: CAMERA.18 TINYBOARD.C18
VDD_IN: CN1.1 CON5.4 S1.3
VDD_RTC_AP: R11.2 TINYBOARD.B4
VDD_USB_1.8V: C145.2 C146.2 U52.12(VD18_O) U52.28(VD18)
VDD_USB_3.3V: C153.2 C161.2 R107.2 R114.1 R116.2 U52.13(VD33) U52.21(VD33_O)
AUDIO_XI2SCDCLK0: R133.1 TINYBOARD.B30 U6.11(MCLK)
AUDIO_XI2SLRCK0: R131.1 TINYBOARD.B31 U6.13(DACLRC)
AUDIO_XI2SSCLK0: R132.1 TINYBOARD.B29 U6.12(BCLK)
AUDIO_XI2SSDI0: R128.1 TINYBOARD.B33 U6.16(ADCDAT)
AUDIO_XI2SSDO0_0: R129.1 TINYBOARD.B32 U6.14(DATDAT)
CAM_A_RESET: CAMERA.4 TINYBOARD.C4
CAM_SCL0: CAMERA.2 TINYBOARD.C2
CAM_SDA0: CAMERA.1 TINYBOARD.C1
CAMERA_A_GPIO2: CAMERA.3 TINYBOARD.C3
DM1-: U52.8(DM2) USBH4.2(D-)
DM2-: U52.4(DM4) USBH3.2(D-)
DM3-: U52.6(DM3) USBH1.2(D-)
DM4-: U52.10(DM1) USBH2.2(D-)
DM9000_RX+: LAN1.3(RX+) R26.1 U4.3(RX+)
DM9000_RX-: LAN1.6(RX-) R29.1 U4.4(RX-)
DM9000_TX+: LAN1.1(TD+) R24.1 U4.7(TX+)
DM9000_TX-: LAN1.2(TD-) R25.1 U4.8(TX-)
DP1+: U52.9(DP2) USBH4.3(D+)
DP2+: U52.5(DP4) USBH3.3(D+)
DP3+: U52.7(DP3) USBH1.3(D+)
DP4+: U52.11(DP1) USBH2.3(D+)
EARPHONE_DETECT: C35.1 R49.1 R92.1 SPK1.2(B)
LANLED: LAN1.11(LEDY-) U4.39(LED1)
LINKLED: LAN1.10(LEDG-) U4.38(LED2)
M_NRESET: C12.1 R15.1 RST.1 TINYBOARD.B3
MICBIAS: C59.2 C60.1 R59.2 U6.1(MICBIAS)
NET_AVDD25: C22.1 C23.1 C24.1 LAN1.4(CT2) LAN1.5(CT1) U4.2(AVDD25_2) U4.9(AVDD25_1)
NWAIT: R5.1 TINYBOARD.B41
OM1: R1.2 TINYBOARD.B1
RSRXD0: COM0.2 U8.13(RIN1)
RSRXD3: COM3.2 U8.8(RIN2)
RSTXD0: COM0.3 U8.14(T1OUT)
RSTXD3: COM3.3 U8.7(T2OUT)
SPK_OUT_LN: C38.1 CON12.2 U6.23(SPK_LN)
SPK_OUT_LP: C37.1 CON12.1 U6.25(SPK_LP)
SPK_OUT_RN: C48.1 CON12.3 U6.19(SPK_RN)
SPK_OUT_RP: C47.1 CON12.4 U6.22(SPK_RP)
WIFI0_PD_GPIO: CON13.11 R12.1 TINYBOARD.A41
WIFI0_RESET_GPIO: CON13.12 R27.2 TINYBOARD.A42
XADCAIN0: C64.1 CON6.1 TINYBOARD.A39 W1.3(WIPER)
XADCAIN1: CON6.3 TINYBOARD.A40
XADCAIN6_YM: CON6.5 TINYBOARD.A38
XADCAIN7_YP: CON6.7 TINYBOARD.A37
XADCAIN8_XM: CON6.9 TINYBOARD.A36
XADCAIN9_XP: CON6.11 TINYBOARD.A35
XCICLKENB: CAMERA.5 TINYBOARD.C5
XCIHREF: CAMERA.6 TINYBOARD.C6
XCIPCLK: CAMERA.8 TINYBOARD.C8
XCIVSYNC: CAMERA.7 TINYBOARD.C7
XCIYDATA0: CAMERA.16 TINYBOARD.C16
XCIYDATA1: CAMERA.15 TINYBOARD.C15
XCIYDATA2: CAMERA.14 TINYBOARD.C14
XCIYDATA3: CAMERA.13 TINYBOARD.C13
XCIYDATA4: CAMERA.12 TINYBOARD.C12
XCIYDATA5: CAMERA.11 TINYBOARD.C11
XCIYDATA6: CAMERA.10 TINYBOARD.C10
XCIYDATA7: CAMERA.9 TINYBOARD.C9
XDACOUT: CON6.13 TINYBOARD.A51
XEINT6_SD0_NWP: CON10.10(WP) R77.1 TINYBOARD.B24
XEINT7: TINYBOARD.B40 U4.34(INT)
XEINT8: CON6.6 TINYBOARD.A30
XEINT9: CON13.16 R28.2 TINYBOARD.B34
XEINT10: LCD1.31(EINT10) LCD2.31(EINT10) LCD3.31(EINT10) TINYBOARD.A22
XEINT11: CON6.8 TINYBOARD.A46
XEINT14: LCD1.43(EINT14) LCD2.40(EINT15) LCD3.40(EINT15) TINYBOARD.C24
XEINT15: LCD1.44(EINT15) TINYBOARD.C22
XEINT16/KP_COL0: CON13.21 K1.1 R35.1 TINYBOARD.A53
XEINT17/KP_COL1: CON13.22 K2.1 R37.1 TINYBOARD.A54
XEINT18/KP_COL2: CON13.23 K3.1 R39.1 TINYBOARD.A55
XEINT19/KP_COL3: CON13.24 K4.1 R40.1 TINYBOARD.A56
XEINT24/KP_ROW0: CON13.25 R43.2 TINYBOARD.A57
XEINT25/KP_ROW1: CON13.26 R64.2 TINYBOARD.A58
XEINT26/KP_ROW2: CON13.27 R65.2 TINYBOARD.A59
XEINT27/KP_ROW3: CON13.28 R66.2 TINYBOARD.A60
XI2CSCL0: CON13.5 R9.2 R57.1 R127.1 TINYBOARD.B19 U5.6(SCL)
XI2CSCL2/IEM_SPWI: LCD1.41(SCL2) LCD2.38(EINT14) LCD3.38(EINT14) TINYBOARD.C23 TPSCL.1
XI2CSDA0: CON13.6 R10.2 R58.1 R126.1 TINYBOARD.B20 U5.5(SDA)
XI2CSDA2/IEM_SCLK: LCD1.42(SDA2) LCD2.39(SDA2) LCD3.39(SDA2) TINYBOARD.C21 TPSDA.1
XM0ADDR0: TINYBOARD.B35
XM0ADDR1: TINYBOARD.B36
XM0ADDR2: R7.2 TINYBOARD.B37
XM0ADDR3: TINYBOARD.B38
XM0CSN1: TINYBOARD.B39 U4.37(CS#)
XM0DATA0: TINYBOARD.B45 U4.18(SD0)
XM0DATA1: TINYBOARD.B46 U4.17(SD1)
XM0DATA2: TINYBOARD.B47 U4.16(SD2)
XM0DATA3: TINYBOARD.B48 U4.14(SD3)
XM0DATA4: TINYBOARD.B49 U4.13(SD4)
XM0DATA5: TINYBOARD.B50 U4.12(SD5)
XM0DATA6: TINYBOARD.B51 U4.11(SD6)
XM0DATA7: TINYBOARD.B52 U4.10(SD7)
XM0DATA8: TINYBOARD.B53 U4.31(SD8)
XM0DATA9: TINYBOARD.B54 U4.29(SD9)
XM0DATA10: TINYBOARD.B55 U4.28(SD10)
XM0DATA11: TINYBOARD.B56 U4.27(SD11)
XM0DATA12: TINYBOARD.B57 U4.26(SD12)
XM0DATA13: TINYBOARD.B58 U4.25(SD13)
XM0DATA14: TINYBOARD.B59 U4.24(SD14)
XM0DATA15: TINYBOARD.B60 U4.22(SD15)
XM0OEN: TINYBOARD.B44 U4.35(IOR#)
XM0WEN: TINYBOARD.B43 U4.36(IOW#)
XMMC0CDN: CON10.11(NCD) R71.1 TINYBOARD.B23
XMMC0DATA0: CON10.7(DAT0) R73.1 TINYBOARD.B25
XMMC0DATA1: CON10.8(DAT1) R72.1 TINYBOARD.B26
XMMC0DATA2: CON10.9(DAT2) R74.1 TINYBOARD.B27
XMMC0DATA3: CON10.1(CD/DAT3) R38.1 TINYBOARD.B28
XMMC2CDN/SPI_MISO2: CON13.15 R14.1 TINYBOARD.A45
XMMC2CLK/SPI_CLK2: CON13.13 R13.1 TINYBOARD.A43
XMMC2CMD/SPI_CSN2: CON13.14 R23.2 TINYBOARD.A44
XMMC2DATA0/SPI_MOSI2: CON13.17 R18.1 TINYBOARD.A47
XMMC2DATA1: CON13.18 R34.2 TINYBOARD.A48
XMMC2DATA2: CON13.19 R19.1 TINYBOARD.A49
XMMC2DATA3: CON13.20 R60.2 TINYBOARD.A50
XMMCCLK0: CON10.5(CLK) R41.1 TINYBOARD.B21
XMMCCMD0: CON10.2(CMD) R42.1 TINYBOARD.B22
XNRSTOUT: LCD1.32(NRESET) LCD2.32(NRESET) LCD3.32(NRESET) R106.2 TINYBOARD.B42 U4.40(PWRST#)
XPWMTOUT0: R6.2 TINYBOARD.A52
XPWMTOUT1: LCD1.30(TOUT1) LCD2.30(TOUT1) LCD3.30(TOUT1) TINYBOARD.A26
XSPICKL1: CON13.9 TINYBOARD.B17
XSPICS1: CON13.10 TINYBOARD.B18
XSPIMISO1: CON13.8 TINYBOARD.B16
XSPIMOSI1: CON13.7 TINYBOARD.B15
XUCTSN1: CON2.2 TINYBOARD.B6
XUHDM: R105.2 R109.2 TINYBOARD.A32
XUHDP: R104.2 R110.2 TINYBOARD.A34
XUODM: MINIUSB1.2(D-) TINYBOARD.A31
XUODP: MINIUSB1.3(D+) TINYBOARD.A33
XUODRVVBUS: TINYBOARD.A28
XUOID: MINIUSB1.4(ID) TINYBOARD.A29
XUOVBUS: C51.1 C52.1 MINIUSB1.1(VBUS) TINYBOARD.A27
XURTSN1: CON2.1 TINYBOARD.B5
XURXD0: CON1.2 R76.2 TINYBOARD.B8
XURXD1: CON2.4 TINYBOARD.B10
XURXD2: CON3.2 CON13.4 TINYBOARD.B12
XURXD3: CON4.2 R79.2 TINYBOARD.B14
XUTXD0: CON1.1 R75.2 TINYBOARD.B7
XUTXD1: CON2.3 TINYBOARD.B9
XUTXD2: CON3.1 CON13.3 TINYBOARD.B11
XUTXD3: CON4.1 R78.2 TINYBOARD.B13
XVHSYNC: LCD1.35(HSYNC) LCD2.35(HSYNC) LCD3.35(HSYNC) TINYBOARD.A24
XVVCLK: LCD1.36(VCLK) LCD2.36(VCLK) LCD3.36(VCLK) LCDCLK.1 TINYBOARD.A25
XVVD0: LCD1.3(VD0) LCD2.3(VD0) LCD3.3(VD0) TINYBOARD.C25
XVVD1: LCD1.4(VD1) LCD2.4(VD1) LCD3.4(VD1) TINYBOARD.C26
XVVD2: LCD1.5(VD2) LCD2.5(VD2) LCD3.5(VD2) TINYBOARD.A20
XVVD3: LCD1.6(VD3) LCD2.6(VD3) LCD3.6(VD3) TINYBOARD.A19
XVVD4: LCD1.7(VD4) LCD2.7(VD4) LCD3.7(VD4) TINYBOARD.A18
XVVD5: LCD1.8(VD5) LCD2.8(VD5) LCD3.8(VD5) TINYBOARD.A17
XVVD6: LCD1.9(VD6) LCD2.9(VD6) LCD3.9(VD6) TINYBOARD.A16
XVVD7: LCD1.10(VD7) LCD2.10(VD7) LCD3.10(VD7) TINYBOARD.A15
XVVD8: LCD1.12(VD8) LCD2.12(VD8) LCD3.12(VD8) TINYBOARD.C27
XVVD9: LCD1.13(VD9) LCD2.13(VD9) LCD3.13(VD9) TINYBOARD.C28
XVVD10: LCD1.14(VD10) LCD2.14(VD10) LCD3.14(VD10) TINYBOARD.A14
XVVD11: LCD1.15(VD11) LCD2.15(VD11) LCD3.15(VD11) TINYBOARD.A13
XVVD12: LCD1.16(VD12) LCD2.16(VD12) LCD3.16(VD12) TINYBOARD.A12
XVVD13: LCD1.17(VD13) LCD2.17(VD13) LCD3.17(VD13) TINYBOARD.A11
XVVD14: LCD1.18(VD14) LCD2.18(VD14) LCD3.18(VD14) TINYBOARD.A10
XVVD15: LCD1.19(VD15) LCD2.19(VD15) LCD3.19(VD15) TINYBOARD.A9
XVVD16: LCD1.21(VD16) LCD2.21(VD16) LCD3.21(VD16) TINYBOARD.C29
XVVD17: LCD1.22(VD17) LCD2.22(VD17) LCD3.22(VD17) TINYBOARD.C30
XVVD18: LCD1.23(VD18) LCD2.23(VD18) LCD3.23(VD18) TINYBOARD.A8
XVVD19: LCD1.24(VD19) LCD2.24(VD19) LCD3.24(VD19) TINYBOARD.A7
XVVD20: LCD1.25(VD20) LCD2.25(VD20) LCD3.25(VD20) TINYBOARD.A6
XVVD21: LCD1.26(VD21) LCD2.26(VD21) LCD3.26(VD21) TINYBOARD.A5
XVVD22: LCD1.27(VD22) LCD2.27(VD22) LCD3.27(VD22) TINYBOARD.A4
XVVD23: LCD1.28(VD23) LCD2.28(VD23) LCD3.28(VD23) TINYBOARD.A3
XVVDEN: LCD1.33(VDEN) LCD2.33(VDEN) LCD3.33(VDEN) TINYBOARD.A21
XVVSYNC: LCD1.34(VSYNC) LCD2.34(VSYNC) LCD3.34(VSYNC) TINYBOARD.A23
N490506: R57.2 U6.17(SCLK)
N490846: R58.2 U6.18(SDIN)
N563338: C46.1 U6.6(RINPUT2)
N563659: C45.1 U6.7(RINPUT3/JD3)
N565258: C44.1 U6.2(LINPUT3/JD2)
N570115: C43.1 U6.5(RINPUT1)
N579751: C36.2 U6.4(LINPUT1)
N580413: C36.1 C41.1 R59.1 R62.2 R67.2
N605417: C34.1 C55.2 R46.2 SPK1.3(C) SPK1.4(D)
N617320: C33.1 C56.2 R47.2 SPK1.1(A)
N3676300: R1.1 R2.2 S2.3
N3676952: R2.1 TINYBOARD.B2
N3684154: R3.2 S2.4
N3780125: F1.1 S1.2
N3805887: LED_3.3.1(ANODE) R4.2
N3869369: R7.1 U4.32(CMD)
N3921053: C19.1 U4.43(X2) Y1.1
N3921204: C20.1 U4.44(X1) Y1.2
N3925254: R8.1 U4.1(BGRES)
N3968686: C25.1 R24.2 R25.2
N3970814: C26.1 R26.2 R29.2
N3982722: LAN1.9(LEDG+) R20.2
N3983324: LAN1.12(LEDY+) R21.2
N4027687: Q2.B(BASE) R6.1 R16.2
N4771984: C42.2 U6.3(LINPUT2)
N5234173: R92.2 U6.15(ADCLRC/GPIO1)
N5390728: C55.1 U6.31(HP_L)
N5390947: C56.1 U6.29(HP_R)
N5424123: C57.2 C58.1 U6.27(VMID)
N6088771: R76.1 U8.12(ROUT1)
N6088773: R78.1 U8.10(T2IN)
N6088775: R79.1 U8.9(ROUT2)
N6095373: C39.2 U8.1(C1+)
N6095738: C39.1 U8.3(C1-)
N6103030: C40.2 U8.2(V+)
N6103395: C49.2 U8.6(V-)
N6105619: C61.1 U8.4(C2+)
N6105986: C61.2 U8.5(C2-)
N6195963: BUZZER1.2 Q2.C(COLLECTOR)
N9633247: MIC2.1(A) MIC2.4(D) R67.1
N9633353: MIC1.1 MIC2.2(B) MIC2.3(C)
N9742067: C137.1 U52.2(XOUT) Y2.1
N9742085: C142.1 U52.3(XIN) Y2.2
N9742255: R105.1 U52.15(DMU)
N9742263: R103.1 U52.14(REXT)
N9742303: R104.1 U52.16(DPU)
N9742345: C162.1 R106.1 R107.1 U52.17(XRSTJ)
N9742489: R108.2 R111.1 U52.18(VBUSM)
N9742525: R114.2 R115.1 U52.19(BUSJ)
N9742579: R116.1 U52.26(OVCJ)
N9742731: C147.2 R117.1 U52.20(VDD5)
N10073905: R75.1 U8.11(T1IN)

Pads without a net: BAT1 3 4; COM0 1 4 6 7 8 9 10 11; COM3 1 4 6 7 8 9 10 11; ID1 1; ID2 1; ID3 1; ID4 1; ID5 1; ID6 1; ID7 1; ID8 1; K1 3; K2 3; K3 3; K4 3; LAN1 7 M3 M4; RST 3; S1 1 4 5; S2 1 2 5; TINYBOARD C17; U4 19 20 21 46; U6 30; U52 22 23 24 25 27

## Via types
v1: diameter 0.711, hole 0.356, TOP to BOTTOM, 1253 vias
v2: diameter 1.016, hole 0.711, TOP to BOTTOM, 6 vias

## Routing (per net, layer and track width the routed paths; a pad name or vN(x,y) marks a point on that pad's centre or on a via; arc(x,y) is an arc through that point)
AGND: length 113.9
  TOP w0.305: v1(137.16,31.88) 137.82,32.54 U6.24 ; v1(136.47,34.85) 136.78,34.54 U6.20 ; U6.28 140.08,30.1 C33.2
  TOP w0.508: v1(140.05,28.32) 139.83,28.32 C33.2
  TOP w0.559: C37.2 133.86,29.83 v1(133.97,29.72) ; C31.2 144.15,29.21 144.15,28.32 144.11,28.28 v1(144.11,28.19) 144.11,28.11 144.27,27.94 144.27,27.81 C34.2 145.09,27.36 v1(145.09,28.38) ; 146.02,20.27 MIC1.2 ; MIC1.2 147.09,21.34 ; MIC1.2 146.02,22.41 ; MIC2.5 144.37,4.9 ; MIC2.5 146.05,3.37 ; MIC2.5 144.37,1.84 ; MIC2.5 142.69,3.37 ; C46.2 v1(147.96,36.83) C45.2 ; C42.1 148.97,35.31 v1(148.08,35.31) 147.07,35.31 C43.2 ; v1(132.59,33.4) 133.35,32.64 C38.2 ; v1(132.59,33.4) 133.1,33.91 C47.2 ; v1(132.59,33.4) 132.59,32.56 130.81,30.78 130.81,25.27 132.33,23.75 135.25,23.75 v1(135.38,23.88) ; R63.2 131.6,34.95 v1(131.06,34.42) 131.06,34.29 130.64,33.86 130.64,33 129.16,31.52 129.16,19.81 130.56,18.41 134.11,18.41 135,19.3 v1(138.18,19.3) ; R63.2 131.6,35.66 130.94,36.32 v1(130.94,36.4) ; R63.2 132.21,35.43 v1(132.72,35.94) 132.84,35.81 C48.2 ; R46.1 141.45,25.12 140.84,24.51 v1(140.84,24) ; v1(149.99,28.32) 150.55,28.88 C32.2 150.55,31.32 C59.1 ; C60.2 146.56,29.51 146.65,29.42 146.65,29.26 146.71,29.2 146.71,29.05 v1(146.81,28.96) ; 134.05,3.37 SPK1.5 ; SPK1.5 135.74,4.9 ; SPK1.5 135.74,1.84 ; SPK1.5 137.42,3.37 ; C57.1 136.78,26.67 v1(137.29,26.16) ; 137.67,27.56 137.67,27.05 v1(138.3,26.42) ; C29.2 134.37,26.16 v1(134.11,25.91) 133.6,25.91 132.84,26.67 C30.2 ; R47.1 138.4,24.54 v1(138.94,24) ; v1(147.57,24.26) 147.96,24.64 R62.1 ; C44.2 v1(148.17,33.02) ; C41.2 v1(149.48,24.51)
  BOTTOM w0.559: 146.02,20.27 MIC1.2 ; MIC1.2 146.02,22.41 ; MIC1.2 147.09,21.34 ; 144.37,1.84 MIC2.5 ; MIC2.5 146.05,3.37 ; MIC2.5 144.37,4.9 ; MIC2.5 142.69,3.37 ; SPK1.5 135.74,4.9 ; SPK1.5 135.74,1.84 ; SPK1.5 137.42,3.37 ; SPK1.5 134.05,3.37
  vias: v1(131.44,14.86) v1(135.89,12.95) v1(138.81,14.22) v1(143.51,18.41) v1(143.51,13.08) v1(145.8,12.06)
GND: length 1842.7
  TOP w0.203: 152.02,47.5 152.02,46.48 ; 118.44,59.03 119.48,59.03 ; 118.34,57.02 119.56,57.02 ; 137.92,90.55 137.92,91.31 138.05,91.44 ; 153.92,45.97 153.92,47.37 154.05,47.5 ; v1(123.8,46.13) 123.65,45.97 122.56,45.97 ; 154.05,45.59 154.05,44.32 ; 136.02,46.61 136.02,47.75 ; 168.02,45.47 168.02,44.58 ; 120.45,56.99 121.67,56.99 ; 130.05,47.75 130.3,48.01 131.34,48.01 ; 120.43,55.09 121.65,55.09 ; 136.02,45.47 136.02,44.45 ; 152.02,45.47 152.02,44.2 152.15,44.07 ; 168.02,46.48 168.02,47.5 ; 120.47,59.05 121.69,59.05 ; 119.99,58.55 119.99,57.25 119.99,57.25 ; 133.99,47.5 133.99,46.61 ; 138.05,45.47 138.05,44.32 ; 133.99,45.47 133.99,44.58 ; 138.05,46.61 138.05,47.5 ; 137.92,89.41 137.92,88.52 ; 147.96,45.59 v1(147.96,44.2) ; 119.93,54.63 119.93,53.32 ; 118.34,55.02 119.56,55.02
  TOP w0.254: 92.81,125.98 93.85,125.98 ; v1(173.23,31.24) 172.62,30.63 U4.15 ; 132,48.01 132.06,47.95 132.06,46.61 132.08,46.59 v1(132.08,45.97) 132.08,45.41 132.06,45.39 132.06,43.92 131.06,42.93 ; 132,48.01 131.34,48.01 ; 132,48.01 133.48,48.01 133.99,47.5 ; 41.4,127.51 41.27,127.38 41.27,126.36 ; 146.24,90.04 146.36,89.92 147.45,89.92 ; 152.02,47.5 152.02,48.13 v1(152.4,48.51) ; 143.99,88.39 143.99,89.53 ; 166.37,90.04 167.64,90.04 ; 93.22,123.7 93.5,123.7 94.36,124.56 ; 43.31,126.36 43.31,127.64 ; 168.02,90.55 168.02,91.69 ; 146.01,88.43 146.01,89.57 ; U4.5 166.76,27.17 v1(167.03,26.9) 167.26,27.13 U4.6 ; 39.37,125.35 39.37,124.21 ; 41.27,125.35 41.27,124.33 ; 129.29,48.11 129.69,48.11 130.05,47.75 ; 142.07,36.22 142.07,36.03 v1(141.6,35.56) v1(140.34,34.29) ; 39.75,125.86 40.89,125.86 ; 146.05,90.55 146.05,91.44 145.92,91.57 ; 90.91,125.98 91.97,125.98 ; 43.31,125.35 43.31,124.33 ; 86.23,127.64 86.36,127.51 86.36,126.36 ; U4.45 v1(164.59,31.14) ; 43.81,125.98 44.96,125.98 ; v1(91.44,81.15) 91.61,80.98 LCD2.37 ; 96.77,125.96 97.94,125.96 ; v1(166.24,35.31) 166.26,35.33 U4.33 ; 154.05,47.5 154.05,47.62 154.24,47.82 ; 81.89,123.67 81.97,123.6 83.29,123.6 83.36,123.67 ; U4.47 v1(164.56,30.14) 164.06,29.63 U4.48 v1(161.75,29.63) ; 164.59,90.04 165.35,90.04 ; 160.53,90.04 161.54,90.04 ; 94.84,126.01 95.89,126.01 ; 152.02,46.48 152.02,45.97 ; 45.34,126.49 45.34,127.64 ; 46.86,125.86 46.74,125.98 45.72,125.98 ; 84.71,125.98 86.11,125.98 ; 88.42,126.09 88.42,127.53 ; v1(126.63,99.5) 126.15,99.5 125.88,99.77 119.33,99.77 v1(119.13,99.57) ; 88.82,125.98 90.02,125.98 ; 87,125.86 87.88,125.86 88.01,125.98 ; U4.41 v1(164.45,33.14) ; 158.5,90.04 159.64,90.04 ; 144.53,90.04 145.41,90.04 ; 39.37,126.49 39.37,127.51 ; 41.78,125.98 42.93,125.98 ; 144.02,90.55 144.02,91.69
  TOP w0.279: v1(89.79,72.64) 89.95,72.48 LCD2.20 ; 125.98,47.6 v1(125.98,46.35) 125.98,44.2 ; LCD2.29 90.05,76.98 v1(89.89,77.14) ; 123.93,46 135.13,46 135.23,45.9 135.25,45.9
  TOP w0.305: 121.92,45.59 121.92,44.2 ; v1(123.8,46.13) 123.49,46.13 ; v1(123.8,46.13) 123.97,45.96 123.97,44.6 123.95,44.59 123.95,44.2 ; v1(123.8,46.13) 123.8,46.43 123.97,46.6 123.97,47.4 123.95,47.41 123.95,47.75 ; v1(149.61,102.74) 150.21,103.34 U52.1 ; 121.92,46.23 121.92,47.62 122.05,47.75 ; 96.36,125.98 96.36,124.21 ; 98.36,125.98 98.36,123.89 98.17,123.7 ; 90.36,125.98 90.36,124.21 ; 98.36,126.49 98.36,127.89 ; 160.12,89.66 160.12,89.41 160.09,89.38 160.09,88.62 160.12,88.59 160.12,88.14 ; 37.34,126.36 37.34,127.38 37.47,127.51 ; 130.05,47.75 130.05,47.41 130.03,47.4 130.03,44.08 130.3,43.81 ; 94.36,124.56 94.36,125.98 ; 161.93,44.32 161.93,46.02 v1(161.85,46.1) ; 166.02,89.66 166.02,88.14 ; 92.36,125.98 92.36,124.21 ; 94.36,126.49 94.36,127.89 ; 162.08,90.42 162.08,91.82 ; 120.27,74.93 121.79,74.93 ; 128.02,47.75 127.97,47.7 127.97,46.6 127.91,46.54 v1(127.91,46.13) 127.91,45.46 127.97,45.4 127.97,44.12 128.14,43.94 ; v1(95.5,68.14) 95.34,67.98 LCD2.11 91.6,67.98 89.9,66.28 89.59,66.28 v1(89.38,66.07) ; 160.08,90.42 160.08,91.82 ; 90.36,126.49 90.36,127.89 ; 162.12,88.14 161.93,88.33 161.93,89.47 162.12,89.66 ; 142.07,36.22 142.09,36.23 U6.9 ; 37.34,125.35 37.34,124.33 37.21,124.21 ; 168.02,89.66 168.02,88.14 ; 37.85,125.98 38.86,125.98 ; 165.99,90.42 165.99,91.82 ; 96.36,126.49 96.36,127.89 ; 164.12,89.66 163.96,89.5 163.96,88.3 164.12,88.14 ; LCD2.20 v1(95.16,72.48) ; 157.99,89.66 157.99,88.27 ; 92.36,126.49 92.36,127.89
  TOP w0.559: v1(101.47,78.23) 101.47,78.31 103.17,80.01 110.08,80.01 110.59,80.52 ; USBH2.6 132.84,122.29 ; USBH2.6 132.84,117.61 ; USBH2.6 130.5,119.95 ; USBH2.6 135.18,119.95 ; USBH4.5 124.41,122.29 ; USBH4.5 122.07,119.95 ; USBH4.5 126.74,119.95 ; USBH4.5 124.41,117.61 ; H4.1 176,6.93 ; H4.1 173.07,4 ; H4.1 176,1.07 ; H4.1 178.93,4 ; CON5.3 14.23,18.72 ; CON5.3 15.42,17.53 ; CON5.3 14.23,16.33 ; 96.01,39.38 U5.4 ; U5.4 v1(96.01,42.55) ; U5.4 96.75,40.77 ; 168.28,111.38 C64.2 167.39,110.49 ; 174.5,102.43 CON6.10 ; CON6.10 174.5,104.81 ; CON6.10 173.3,103.62 ; v1(101.6,64.01) v1(107.06,64.01) 108.46,64.01 110.49,66.04 v1(110.59,66.04) ; 165.48,109.88 C73.2 164.41,110.95 ; H3.1 176,128.93 ; H3.1 173.07,126 ; H3.1 178.93,126 ; H3.1 176,123.07 ; 3.96,93.27 K2.2 ; K2.2 3.96,95.4 ; K2.2 5.03,94.34 ; K2.2 2.89,94.34 ; H7.1 6.93,106 ; H7.1 1.78,108.22 v1(1.78,108.46) 1.78,108.78 H8.1 ; H7.1 1.07,106 ; H7.1 4,103.07 ; C11.2 39.12,29.59 ; C11.2 40.01,30.99 ; C11.2 39.12,31.88 ; K4.2 5.03,82.15 ; K4.2 2.89,82.15 ; K4.2 3.96,83.21 ; K4.2 3.96,81.08 ; H13.1 106,108.93 ; H13.1 103.07,106 ; H13.1 108.93,106 ; MINIUSB1.9 108.08,4.53 ; MINIUSB1.9 108.08,1.56 ; MINIUSB1.9 109.27,3.04 ; MINIUSB1.9 106.9,3.04 ; 47.38,126.93 CON13.30 46.31,127.99 ; 1.07,26 H5.1 ; H5.1 4,28.93 ; H5.1 4,23.07 ; H5.1 6.93,26 ; MINIUSB1.8 99.18,4.53 ; MINIUSB1.8 100.37,3.04 ; MINIUSB1.8 98,3.04 ; MINIUSB1.8 99.18,1.56 ; 168.66,42.16 C17.2 167.77,41.27 ; C24.2 161.78,23 v1(162.69,22.1) ; 18.31,127.99 CON13.2 17.24,126.93 ; C96.2 v1(153.8,116.2) ; C96.2 152.2,117.27 ; C96.2 152.2,115.14 ; CAMERA.20 103.83,126.93 v1(105.16,125.6) ; CAMERA.20 103.2,126.93 102.36,127.76 ; CAMERA.20 103.38,126.49 102.74,125.86 ; K1.2 3.96,101.5 ; K1.2 5.03,100.43 ; K1.2 2.89,100.43 ; K1.2 3.96,99.37 ; USBH1.4 158.76,117.23 ; USBH1.4 156.25,117.23 ; USBH1.4 157.5,115.98 ; USBH1.4 157.5,118.49 ; v1(107.06,74.04) v1(110.59,74.04) 112.14,74.04 v1(113.54,75.44) ; USBH4.4 114.32,118.49 ; USBH4.4 113.07,117.23 ; USBH4.4 114.32,115.98 ; USBH4.4 115.58,117.23 ; 123.97,11.57 USBH3.4 ; USBH3.4 122.71,12.83 ; USBH3.4 123.97,14.09 ; USBH3.4 125.23,12.83 ; C20.2 v1(157.62,31.51) ; v1(173.74,39.12) 173.74,38.1 C16.2 ; CON10.6 71.57,99.55 ; CON10.6 69.76,99.55 ; CON10.6 70.67,100.87 ; CON10.6 v1(70.67,97.72) ; 120.32,107.52 C74.2 ; 120.32,107.52 119.33,107.52 ; 120.32,107.52 v1(119.38,108.46) ; C74.2 120.4,106.45 ; C74.2 121.46,107.52 ; 50.04,118.99 CON10.12 ; CON10.12 51.59,120.54 ; CON10.12 50.04,122.09 ; CON10.12 48.49,120.54 ; 98,8.69 MINIUSB1.7 ; MINIUSB1.7 100.37,8.69 ; MINIUSB1.7 99.18,7.21 ; MINIUSB1.7 99.18,10.18 ; C67.2 13.34,128.24 ; C67.2 14.4,127.18 ; C67.2 v1(11.86,127.18) ; CN1.3 12.02,9.1 ; CN1.3 10.7,7.68 ; CN1.3 10.7,10.53 ; CN1.3 9.38,9.1 ; 154.24,47.82 154.94,48.51 v1(155.32,48.51) ; USBH2.4 137.17,117.23 ; USBH2.4 135.91,118.49 ; USBH2.4 134.66,117.23 ; USBH2.4 135.91,115.98 ; 174.5,102.27 CON6.12 173.3,101.08 ; CON3.4 5.3,50.68 ; CON3.4 3.54,49.43 ; CON3.4 7.07,49.43 ; C21.1 173.26,24.99 174.12,24.13 v1(174.18,24.13) ; C15.2 158.95,38.66 ; C15.2 v1(157.61,37.59) ; C15.2 158.95,36.53 ; v1(138.3,101.98) 138.49,102.17 138.84,102.17 139.07,102.36 C145.1 ; v1(119.13,99.57) 118.11,100.58 v1(115.95,100.58) v1(110.74,100.58) v1(104.39,100.58) v1(91.82,100.58) v1(88.14,100.58) 88.14,100.46 v1(84.77,97.09) v1(81.22,93.54) 78.99,91.31 v1(78.87,91.31) 78.74,91.19 78.4,91.19 78.33,91.26 77.63,91.26 77.55,91.19 v1(73.03,91.19) v1(66.67,91.19) v1(61.47,91.19) v1(56.9,91.19) v1(53.72,91.19) 51.31,91.19 v1(50.29,92.2) v1(46.36,96.14) v1(41.97,100.52) v1(37.66,104.84) 35.94,106.55 v1(35.94,107.95) v1(35.94,112.78) 35.94,113.41 ; MINIUSB1.5 105.23,10.98 v1(105.66,11.4) ; MINIUSB1.5 105.23,7.61 ; MINIUSB1.5 105.92,9.09 ; 10.88,12.1 CN1.2 ; CN1.2 13.52,12.1 ; CN1.2 12.2,13.53 ; CN1.2 12.2,10.68 ; 94.31,27.18 Q2.E ; Q2.E 95.25,26.14 ; Q2.E 96.19,27.18 ; Q2.E 95.25,28.22 ; 95.14,31.14 R16.1 96.01,32.04 ; USBH1.6 156.77,119.95 ; USBH1.6 154.43,122.29 ; USBH1.6 154.43,117.61 ; H8.1 4,113.93 ; H8.1 1.07,111 ; H8.1 6.93,111 ; 3.54,39.01 CON4.4 ; CON4.4 5.3,40.27 ; CON4.4 7.07,39.01 ; H2.1 6.93,126 ; H2.1 1.07,126 ; H2.1 4,123.07 ; H2.1 4,128.93 ; 3.96,87.17 K3.2 ; K3.2 3.96,89.31 ; K3.2 2.89,88.24 ; K3.2 5.03,88.24 ; 6.92,114.72 W1.1 ; W1.1 6.92,117.16 ; W1.1 8.14,115.94 ; W1.1 5.7,115.94 ; 177.32,30.94 RST.2 176.25,32 ; 83.09,9.03 COM0.5 ; COM0.5 84.34,10.29 ; COM0.5 81.83,10.29 ; COM0.5 83.09,11.55 ; R8.2 v1(156.72,23.56) ; H9.1 14,38.93 ; H9.1 16.93,36 ; H9.1 11.07,36 ; H9.1 14,33.07 ; CON6.14 175.69,98.54 ; CON6.14 173.3,98.54 ; CON6.14 174.5,97.35 ; USBH3.6 127.04,12.45 ; USBH3.6 124.71,10.11 ; USBH3.6 127.04,7.77 ; 80.9,35.41 BAT1.2 ; BAT1.2 78.44,37.08 ; BAT1.2 83.36,37.08 ; 106,23.07 H6.1 ; H6.1 106,28.93 ; H6.1 108.93,26 ; H6.1 103.07,26 ; 126,108.07 H14.1 ; H14.1 128.93,111 ; H14.1 126,113.93 ; H14.1 123.07,111 ; 50.04,25.65 U8.15 ; 50.04,25.65 50.55,25.65 C68.2 ; 50.04,25.65 50.42,25.27 C68.2 ; v1(149.48,41.91) 148.51,40.94 C54.2 ; 11.07,106 H10.1 ; H10.1 14,108.93 ; H10.1 14,103.07 ; H10.1 16.93,106 ; 21.72,93.98 v1(21.72,95.25) ; USBH2.5 146,122.29 ; USBH2.5 143.66,119.95 ; USBH2.5 148.33,119.95 ; 101.09,19.18 C52.2 100.2,18.29 ; 105.16,84.71 v1(107.7,84.71) 109.47,84.71 110.11,85.34 113.49,85.34 117.14,89 TINYBOARD.A2 ; U5.7 v1(93.47,48.39) ; CON1.4 5.3,75.32 ; CON1.4 3.54,74.06 ; CON1.4 7.07,74.06 ; C23.2 v1(171.69,22.37) ; v1(103.25,58.29) 104.78,59.82 v1(116.59,59.82) ; v1(163.55,26.11) 163.18,25.74 C26.2 ; H11.1 108.93,36 ; H11.1 103.07,36 ; H11.1 106,33.07 ; H11.1 106,38.93 ; C142.2 v1(157.35,105.66) ; D6.1 24.51,17.48 ; D6.1 26.34,16.05 ; D6.1 22.68,16.05 ; D6.1 24.51,14.61 ; v1(138.81,108.2) 139.7,108.2 C162.2 ; 167.59,117.61 USBH1.5 ; USBH1.5 169.92,119.95 ; USBH1.5 167.59,122.29 ; USBH1.5 165.25,119.95 ; 101.83,21.08 C51.2 100.76,22.15 ; 93.47,39.09 U5.2 v1(93.47,42.55) ; MINIUSB1.6 109.27,8.69 ; MINIUSB1.6 108.08,10.18 ; MINIUSB1.6 106.9,8.69 ; MINIUSB1.6 108.08,7.21 ; 111.99,89.86 115.86,93.73 117.2,93.73 v1(117.25,93.77) 117.29,93.73 119.99,93.73 v1(120.03,93.77) 119.99,93.77 ; USBH4.6 111.25,122.29 ; USBH4.6 113.59,119.95 ; USBH4.6 111.25,117.61 ; USBH4.6 108.91,119.95 ; CON2.6 7.07,63.73 ; CON2.6 3.54,63.73 ; CON2.6 5.3,64.99 ; 129.93,35.43 R63.1 130.02,35.59 v1(129.03,36.58) ; 129.93,35.43 v1(128.78,35.43) ; 129.93,35.43 129.54,35.04 v1(129.54,34.16) ; C147.1 138.56,106.43 138.3,106.68 v1(138.38,106.68) ; v1(169.57,26.14) 170.16,25.54 C25.2 ; USBH3.5 113.89,12.45 ; USBH3.5 113.89,7.77 ; USBH3.5 111.55,10.11 ; USBH3.5 116.22,10.11 ; C50.2 146.56,41.78 v1(146.94,42.16) ; 15.57,17.53 CON5.2 ; CON5.2 16.77,18.72 ; CON5.2 16.77,16.33 ; H1.1 4,6.93 ; H1.1 4,1.07 ; H1.1 1.07,4 ; H1.1 6.93,4 ; v1(161.16,26.67) 160.29,25.8 C22.2 159.11,25.8 v1(158.62,26.29) ; C161.1 156.21,112.12 R103.2 v1(156.24,113.39) ; v1(94.74,42.55) U5.3 94.74,38.79 ; v1(88.65,59.69) 89.17,60.22 LCD2.A ; C35.2 v1(126.62,20.07) ; 115.14,19.23 C97.2 ; C97.2 116.21,20.3 ; C97.2 117.27,19.23 ; 64.01,100.87 CON10.3 64.01,98.23 ; 152.43,103.34 U52.1 151.1,102.73 ; 118.11,18.7 118.11,19.94 v1(118.11,19.94) ; 45.63,10.29 COM3.5 ; COM3.5 46.89,9.03 ; COM3.5 48.15,10.29 ; COM3.5 46.89,11.55 ; v1(38.48,27.81) 38.48,28.3 39.4,29.21 C40.1 41.05,29.21 v1(41.27,28.98) ; C12.2 v1(177.93,35.31) ; C62.1 v1(65.02,94.36) ; C68.2 v1(52.2,25.27) ; C10.2 29.97,30.99 v1(29.84,30.86) ; C10.2 31.32,32.05 ; C10.2 31.32,29.92 ; CON10.13 80.8,121.76 ; CON10.13 79.25,123.31 ; CON10.13 79.25,120.21 ; CON10.13 77.7,121.76 ; 91.47,40.77 U5.1 ; U5.1 92.2,39.38 ; U5.1 v1(92.2,42.55) ; v1(130.05,93.93) v1(130.05,91.69) ; R109.1 v1(134.49,113.67) ; 111.82,82.87 111.28,82.32 103.89,82.32 ; U2.1 v1(35.56,26.04) ; U2.1 36.59,27.94 ; U2.1 35.56,29.36 ; 39.5,16.64 C49.1 ; C49.1 40.39,17.53 ; C49.1 38.61,17.53 ; v1(105.18,76.83) v1(110.59,76.83) 111.19,76.83 113.39,79.04 v1(113.38,79.04) ; C18.2 v1(157.48,35.31) ; 172.97,37.97 C16.2 ; C16.2 173.86,38.86 ; 20.28,3.64 LED_3.3.2 ; LED_3.3.2 v1(22.65,3.64) ; LED_3.3.2 21.35,2.51 ; R115.2 v1(134.75,104.27) ; v1(26.67,116.08) v1(29.97,112.78) 31.18,111.57 v1(31.18,108.2) 31.18,105.35 v1(33.65,102.87) v1(36.7,99.82) v1(41.72,94.81) v1(45.47,91.06) 48.7,87.82 v1(53.98,87.82) v1(58.8,87.82) v1(64.26,87.82) v1(70.48,87.82) v1(76.96,87.82) 79.57,87.82 v1(81.98,90.23) v1(84.77,93.03) 89.41,97.66 v1(90.42,97.66) v1(107.06,97.66) ; 131.06,42.93 129.67,42.93 ; v1(155.83,108.08) 156.21,108.46 C146.1 ; C9.2 v1(29.08,26.42) ; C8.2 13.25,27.18 ; C8.2 11.54,29.14 ; C8.2 9.84,27.18 ; C8.2 11.54,25.22 ; v1(147.57,55.5) v1(146.05,55.5) v1(144.53,55.5) v1(141.22,55.5) v1(139.7,55.5) v1(137.67,55.5) ; 126,23.07 H12.1 ; H12.1 126,28.93 ; H12.1 123.07,26 ; 89.92,44.96 v1(91.31,44.96) ; 167.89,110.95 v1(167.89,109.35) ; v1(113.69,97.76) 113.79,97.85 117.16,97.85 118.21,96.8 v1(120.52,96.8) ; 111.93,89.79 101.85,89.79 v1(100.01,87.95) 97.3,85.24 v1(96.09,85.24) v1(92.99,85.24) LCD2.B ; 29.08,48.18 31.77,48.18 33.37,49.79 v1(33.98,49.79) ; v1(89.89,77.14) v1(87.38,77.14) ; R3.1 175.26,28.81 174.65,29.42 v1(174.65,29.47) ; R110.1 v1(134.49,111.63) ; C153.1 138.81,104.39 138.3,103.89 v1(138.34,103.89) ; C19.2 v1(157.49,33.54) ; C137.2 v1(157.48,104.01) ; R111.2 v1(132.69,109.19)
  BOTTOM w0.203: 137.97,46.51 137.97,47.55 ; 165.99,46.48 165.99,47.5 ; 160.02,46.35 160.02,47.5 ; 171.96,47.62 172.09,47.5 172.09,46.48 ; 142.58,92.21 142.92,91.87 v1(144.03,91.87) v1(146.02,91.87) 147.81,91.87 148,91.69 ; v1(126.87,62.36) v1(126.87,65.79) v1(126.87,71.12) v1(126.87,74.68) ; 148,90.47 148,91.69 ; 148,91.69 148.29,91.98 149.57,91.98 ; 138,45.49 138,44.45 ; 169.93,47.78 169.93,46.48 ; v1(129.9,46.15) 129.9,46.6 129.91,46.62 129.91,47.38 129.9,47.4 129.9,47.99 130,48.09 ; 163.96,89.41 163.96,88.52 164.08,88.39 ; 149.99,46.35 149.99,44.2 ; v1(161.85,46.1) 162,46.25 162,47.47 ; 136.02,91.44 136.02,90.55 ; 171.96,45.47 171.96,44.45 ; 126.06,47.93 125.98,47.85 v1(125.98,46.35) ; 133.99,89.41 133.99,88.14 ; v1(124.83,52.12) 124.13,52.12 123.55,51.53 117.32,51.53 117.09,51.31 ; 127.97,48.09 127.91,48.03 127.91,47.39 127.91,47.38 127.91,46.62 127.91,46.61 v1(127.91,46.13) ; 160.02,45.59 160.02,44.45 ; 118.29,45.9 119.58,45.9 ; 131.95,89.41 131.95,88.27 ; 136.02,89.41 136.02,88.52
  BOTTOM w0.254: 33.27,125.35 33.27,124.33 ; 37.34,126.49 37.34,127.38 ; v1(125.98,46.35) 125.6,45.97 ; 25.27,126.36 25.27,127.38 ; 120.52,74.93 121.79,74.93 ; 32.89,125.98 32.77,125.86 31.88,125.86 ; 31.24,126.24 31.24,127.25 ; 21.72,125.86 22.99,125.86 ; 35.81,125.98 36.83,125.98 ; 156.01,49.61 156.01,46.1 ; 122.22,68.99 122.73,68.99 v1(122.86,68.86) ; 118.49,75.06 119.63,75.06 ; 35.31,126.36 35.31,127.38 ; 34.8,125.86 34.67,125.98 33.91,125.98 ; 23.88,125.98 24.89,125.98 ; 25.78,125.86 28.96,125.86 ; 176.05,47.73 176.05,44.22 ; 25.27,125.48 25.27,124.46 ; 29.34,126.24 29.34,127.25 ; 35.31,125.48 35.31,124.46 ; 29.34,125.35 29.34,124.33 ; 23.24,125.48 23.24,124.46 ; 120.24,70.94 121.87,70.94 ; 33.27,126.24 33.27,127.25 ; 23.37,126.36 23.37,127.51 ; 21.34,126.49 21.34,127.38 ; 21.34,125.35 21.34,124.46 ; 29.84,125.86 30.86,125.86 ; 27.3,125.35 27.3,124.33 ; 37.34,125.35 37.34,124.33 ; 27.3,126.24 27.3,127.25 ; 31.24,125.35 31.24,124.33
  BOTTOM w0.279: 132.33,43.97 132.08,44.22 v1(132.08,45.97) 132.08,47.9 131.89,48.09 ; 124.03,47.93 124.03,46.35 v1(123.8,46.13) ; 127.97,48.09 127.97,46.19 v1(127.91,46.13) ; v1(125.98,46.35) 126.14,46.51 126.06,46.58 126.06,47.93 126.14,48.01 ; v1(129.9,46.15) 130,46.25 130,48.09 ; 170.69,46 176.4,46
  BOTTOM w0.305: 173.99,45.59 173.99,44.2 ; 152.02,45.72 152.02,44.2 ; 171.96,91.69 171.96,90.3 ; LCD1.29 42.82,53.61 42.82,53.62 v1(42.82,53.75) ; 47.24,69.6 46.82,69.17 LCD3.37 46.82,65.88 v1(46.94,65.76) ; 118.52,68.99 120.02,68.99 ; 120.02,68.99 122.22,68.99 ; 120.02,68.99 119.99,69.01 119.99,71.01 TINYBOARD.C20 ; v1(46.99,53.75) 46.99,53.57 ; 46.99,53.57 47.32,53.24 LCD1.38 ; 46.99,53.57 46.82,53.4 LCD1.37 ; v1(42.57,71.34) 42.55,71.31 42.55,70.32 42.8,70.06 42.8,69.45 42.82,69.44 LCD3.29 42.82,65.55 v1(42.8,65.53) ; v1(37.97,69.47) 38.32,69.13 LCD3.20 v1(38.32,65.55) ; 132.05,91.97 130.33,91.97 v1(130.05,91.69) ; 132.05,91.97 132.05,90.45 ; 132.05,91.97 133.96,91.97 ; LCD1.11 33.81,49.95 v1(33.98,49.79) ; 121.92,90.17 121.92,91.37 121.38,91.91 121.27,91.91 121.15,92.04 ; 149.99,47.88 149.99,46.35 ; 154.05,46.23 154.05,47.88 ; 134.01,90.5 134.01,91.92 133.96,91.97 ; 153.92,45.59 153.92,44.07 ; v1(130.18,87.38) 130.05,87.5 130.05,89.53 ; v1(123.95,91.82) 124.17,92.04 125.73,92.04 125.98,91.78 v1(125.98,91.69) ; v1(123.95,91.82) 123.85,91.82 123.63,92.04 122.64,92.04 122.05,91.44 121.45,92.04 121.15,92.04 ; v1(123.95,91.82) 123.95,90.55 ; 171.96,89.66 171.96,88.14 ; v1(128.02,91.69) 127.67,92.04 126.33,92.04 v1(125.98,91.69) ; v1(128.02,91.69) 128.24,91.91 129.83,91.91 v1(130.05,91.69) ; v1(128.02,91.69) 128.02,90.3 ; 120.85,92.05 121.14,92.05 121.15,92.04 ; v1(126.24,87.76) 125.98,88.01 125.98,89.66 ; v1(128.16,87.89) 128.02,88.04 128.02,89.53 ; 147.96,45.85 v1(147.96,44.2) ; 149.99,44.2 v1(149.99,44.07) ; v1(130.05,91.69) 130.05,90.42 ; LCD1.45 50.82,52.85 51.18,53.21 v1(51.18,53.75) ; v1(125.98,91.69) 125.98,90.3 ; 120.06,90.09 119.89,89.92 ; 136.02,91.44 136.02,91.74 135.79,91.97 133.96,91.97 ; LCD1.40 48.32,53.38 48.01,53.7 ; 48.01,53.7 48.01,53.44 47.82,53.25 LCD1.39 ; 48.01,53.7 v1(48.01,53.77) ; 147.96,47.88 147.96,46.23 ; 152.02,46.23 152.02,47.75 ; 173.99,47.75 173.99,46.23 ; LCD1.20 v1(38.32,53.75) ; v1(33.82,69.47) LCD3.11 v1(33.82,65.69) ; v1(137.92,90.17) 137.92,88.01
  BOTTOM w0.559: 1.07,4 H1.1 ; H1.1 6.93,4 ; H1.1 4,6.93 ; H1.1 4,1.07 ; LCD3.A 26.05,66.63 ; LCD3.A 26.05,63.23 ; LCD3.A 28.01,64.93 ; LCD3.A 24.1,64.93 ; 10.88,12.1 CN1.2 ; CN1.2 12.2,10.68 ; CN1.2 13.52,12.1 ; CN1.2 12.2,13.53 ; 117.65,72.57 118.22,72 TINYBOARD.C20 119.01,72 119.76,71.25 ; 111.86,58.58 v1(109.73,60.71) 107.06,63.37 v1(107.06,64.01) v1(107.06,68.58) v1(107.06,72.64) ; 111.86,58.58 v1(111.89,58.58) ; 111.86,58.58 115.06,55.37 115.06,55.27 114.81,55.02 114.81,53.34 ; 113.07,117.23 USBH4.4 ; USBH4.4 114.32,118.49 ; USBH4.4 115.58,117.23 ; USBH4.4 114.32,115.98 ; K4.2 3.96,83.21 ; K4.2 3.96,81.08 ; K4.2 2.89,82.15 ; K4.2 5.03,82.15 ; USBH4.5 126.74,119.95 ; USBH4.5 124.41,117.61 ; USBH4.5 124.41,122.29 ; USBH4.5 122.07,119.95 ; 175.19,30.94 RST.2 ; RST.2 177.32,30.94 ; RST.2 176.25,29.87 ; RST.2 176.25,32 ; 6.92,114.72 W1.1 ; W1.1 6.92,117.16 ; W1.1 5.7,115.94 ; 3.96,87.17 K3.2 ; K3.2 2.89,88.24 ; K3.2 3.96,89.31 ; K3.2 5.03,88.24 ; H9.1 16.93,36 ; H9.1 14,38.93 ; H9.1 14,33.07 ; H9.1 11.07,36 ; CON3.4 7.07,49.43 ; CON3.4 3.54,49.43 ; CON3.4 5.3,50.68 ; USBH4.6 113.59,119.95 ; USBH4.6 111.25,117.61 ; USBH4.6 111.25,122.29 ; USBH4.6 108.91,119.95 ; 134.66,117.23 USBH2.4 ; USBH2.4 135.91,115.98 ; USBH2.4 135.91,118.49 ; USBH2.4 137.17,117.23 ; 132.84,117.61 USBH2.6 135.18,119.95 ; 173.3,98.54 CON6.14 ; CON6.14 174.5,99.73 ; CON6.14 174.5,97.35 ; CON6.14 175.69,98.54 ; COM3.5 48.15,10.29 ; COM3.5 45.63,10.29 ; COM3.5 46.89,11.55 ; COM3.5 46.89,9.03 ; 106,103.07 H13.1 ; H13.1 106,108.93 ; H13.1 103.07,106 ; H13.1 108.93,106 ; 119.89,89.92 119,89.03 TINYBOARD.A2 118.77,89 117.98,89.79 ; 173.07,126 H3.1 ; H3.1 176,128.93 ; H3.1 178.93,126 ; H3.1 176,123.07 ; 152.09,119.95 USBH1.6 ; USBH1.6 156.77,119.95 ; USBH1.6 154.43,117.61 ; CON2.6 5.3,64.99 ; CON2.6 3.54,63.73 ; CON2.6 7.07,63.73 ; H11.1 108.93,36 ; H11.1 103.07,36 ; H11.1 106,33.07 ; 124.71,10.11 USBH3.6 ; USBH3.6 127.04,7.77 ; USBH3.6 127.04,12.45 ; v1(95.25,122.94) v1(91.69,119.38) v1(91.69,113.03) v1(91.69,104.27) 91.69,100.84 v1(94.87,97.66) v1(102.55,89.98) v1(110.17,82.36) 113.38,79.15 v1(113.38,79.04) ; 126,108.07 H14.1 ; H14.1 123.07,111 ; H14.1 126,113.93 ; H14.1 128.93,111 ; 19.43,125.98 18.49,126.93 CON13.2 ; 167.59,117.61 USBH1.5 ; USBH1.5 165.25,119.95 ; USBH1.5 169.92,119.95 ; LCD1.A 28.01,48.72 ; LCD1.A 26.05,47.02 ; LCD1.A 24.1,48.72 ; LCD1.A 26.05,50.43 ; v1(88.14,120.14) v1(88.14,113.03) v1(88.14,104.27) v1(88.14,100.58) 88.14,99.95 v1(90.42,97.66) v1(97.73,90.36) v1(105.73,82.36) v1(107.76,80.33) 110.59,77.5 v1(110.59,76.83) v1(110.59,74.04) v1(110.59,70.36) v1(110.59,66.04) v1(112.89,63.74) 116.59,60.05 v1(116.59,59.82) ; H6.1 108.93,26 ; H6.1 106,28.93 ; H6.1 106,23.07 ; H6.1 103.07,26 ; v1(117.73,63.93) v1(116.23,65.43) 114.81,66.85 v1(114.81,66.9) 114.76,66.9 113.54,68.12 v1(113.54,71.15) v1(113.54,75.44) ; 2.89,94.34 K2.2 ; K2.2 5.03,94.34 ; K2.2 3.96,95.4 ; K2.2 3.96,93.27 ; LCD1.B 53.57,50.44 ; LCD1.B 53.57,47.04 ; LCD1.B 51.62,48.74 ; LCD1.B 55.53,48.74 ; 156.25,117.23 USBH1.4 ; USBH1.4 157.5,115.98 ; USBH1.4 158.76,117.23 ; USBH1.4 157.5,118.49 ; CON5.3 14.23,18.72 ; CON5.3 15.42,17.53 ; CON5.3 13.03,17.53 ; CON5.3 14.23,16.33 ; v1(120.03,93.77) 120.63,94.37 123.74,94.37 124.19,93.93 v1(130.05,93.93) 140.26,93.93 v1(140.72,93.47) 140.72,93.55 140.34,93.93 ; CON6.10 174.5,104.81 ; CON6.10 174.5,102.43 ; CON6.10 173.3,103.62 ; CON6.10 175.69,103.62 ; H4.1 178.93,4 ; H4.1 173.07,4 ; H4.1 176,1.07 ; H4.1 176,6.93 ; 162.02,92.04 161.38,92.69 160.46,92.69 159.92,93.22 159.63,93.22 157.45,95.4 v1(157.45,95.45) ; CON6.12 175.69,101.08 ; CON6.12 174.5,99.89 ; CON6.12 173.3,101.08 ; CON6.12 174.5,102.27 ; 4,23.07 H5.1 ; H5.1 1.07,26 ; H5.1 4,28.93 ; H5.1 6.93,26 ; v1(40.89,74.93) 41.78,74.04 41.78,73.41 42.57,72.62 v1(42.57,71.34) ; USBH3.5 113.89,12.45 ; USBH3.5 116.22,10.11 ; USBH3.5 113.89,7.77 ; USBH3.5 111.55,10.11 ; 126.14,48.01 126.46,48.01 126.55,48.09 131.89,48.09 133.86,50.06 v1(133.86,50.72) ; v1(126.63,99.5) 128.13,98 139.57,98 v1(139.57,98.01) ; 16.77,16.33 CON5.2 ; CON5.2 17.96,17.53 ; CON5.2 16.77,18.72 ; CON5.2 15.57,17.53 ; K1.2 5.03,100.43 ; K1.2 3.96,99.37 ; K1.2 2.89,100.43 ; K1.2 3.96,101.5 ; CN1.3 12.02,9.1 ; CN1.3 10.7,10.53 ; CN1.3 9.38,9.1 ; CN1.3 10.7,7.68 ; CON1.4 5.3,75.32 ; CON1.4 7.07,74.06 ; CON1.4 3.54,74.06 ; 148.33,119.95 USBH2.5 146,117.61 ; 1.07,106 H7.1 4,103.07 ; 122.71,12.83 USBH3.4 ; USBH3.4 125.23,12.83 ; USBH3.4 123.97,11.57 ; USBH3.4 123.97,14.09 ; 47.38,126.93 CON13.30 46.31,127.99 ; 17.24,126.93 CON13.2 ; CON13.2 18.31,127.99 ; H10.1 14,108.93 ; H10.1 11.07,106 ; H10.1 14,103.07 ; v1(107.06,97.66) 107.06,96.27 108.39,94.94 v1(108.55,94.94) ; CON4.4 5.3,40.27 ; CON4.4 7.07,39.01 ; CON4.4 3.54,39.01 ; COM0.5 83.09,11.55 ; COM0.5 81.83,10.29 ; COM0.5 84.34,10.29 ; COM0.5 83.09,9.03 ; 126,23.07 H12.1 126,28.93 ; H2.1 6.93,126 ; H2.1 4,128.93 ; H2.1 1.07,126 ; H2.1 4,123.07 ; 170.69,46 170.41,46 169.93,46.48 ; H8.1 4,113.93 ; H8.1 6.93,111 ; H8.1 1.07,111 ; 51.07,63.24 LCD3.B ; LCD3.B 53.03,64.94 ; LCD3.B 51.07,66.64
  vias: v1(1.52,76.83) v1(1.78,85.09) v1(2.03,90.55) v1(2.21,33.91) v1(2.54,67.06) v1(2.67,64.52) v1(4.06,75.95) v1(5.85,97.12) v1(5.8,91.09) v1(5.97,83.82) v1(6.1,86.23) v1(6.48,108.33) v1(6.48,20.45) v1(6.81,98.45) v1(7.75,7.75) v1(7.82,70.88) v1(8.13,86.74) v1(8.08,84.51) v1(8.07,46.22) v1(8.19,88.92) v1(8.26,63.15) v1(8.34,60.51) v1(8.34,56.75) v1(8.38,65.91) v1(8.38,11.56) v1(8.54,68.99) v1(8.47,58.78) v1(8.56,54.9) v1(8.67,52.35) v1(8.89,26.8) v1(9.02,122.17) v1(9.02,29.34) v1(9.02,23.62) v1(9.16,44.38) v1(9.19,41.99) v1(9.27,83.19) v1(9.65,2.03) v1(9.87,63.15) v1(10.1,70.88) v1(10.16,123.19) v1(10.27,54.87) v1(11.3,24.64) v1(11.38,99.35) v1(11.42,30.08) v1(11.81,103.12) v1(11.81,100.58) v1(11.94,123.95) v1(12.25,115.63) v1(13.59,27.56) v1(13.97,111.43) v1(14.1,7.75) v1(14.61,90.04) v1(14.99,87.88) v1(15.24,86.23) v1(15.23,65.61) v1(15.37,127.13) v1(15.41,114.16) v1(15.37,25.53) v1(15.37,19.81) v1(15.37,2.03) v1(15.85,50.22) v1(15.88,84.71) v1(15.87,61.6) v1(15.92,58.26) v1(16.13,124.33) v1(16.28,47.4) v1(16.49,70.65) v1(16.89,98.04) v1(17.48,14.05) v1(17.7,46.5) v1(17.65,20.07) v1(17.91,97.66) v1(18.41,79.5) v1(18.54,55.4) v1(18.54,7.75) v1(18.61,123.4) v1(18.85,76.99) v1(19.02,114.89) v1(19.01,52.97) v1(19.15,72.42) v1(19.19,44.35) v1(19.5,58.39) v1(20.53,61.11) v1(21.06,31.34) v1(21.08,30.23) v1(21.08,2.03) v1(21.23,112.37) v1(21.32,42.32) v1(21.34,21.59) v1(21.59,97.79) v1(21.84,15.75) v1(21.97,29.59) v1(22.35,55.4) v1(22.48,106.81) v1(22.67,109.5) v1(23.11,73.53) v1(23.11,13.97) v1(23.24,58.32) v1(23.75,68.9) v1(23.75,66.23) v1(23.88,63.68) v1(24.26,61.11) v1(24.26,54.1) v1(24.43,77.14) v1(25.15,84.58) v1(25.4,13.97) v1(25.53,6.48) v1(25.53,2.03) v1(25.55,56.34) v1(25.65,102.11) v1(26.16,52.2) v1(26.42,38.1) v1(26.54,30.86) v1(26.92,16.26) v1(27.05,90.42) v1(27.43,50.93) v1(27.69,68.9) v1(27.74,54.2) v1(27.81,21.84) v1(27.94,24) v1(28.09,58.19) v1(28.24,65.41) v1(28.2,61.73) v1(28.45,73.28) v1(28.83,30.86) v1(28.96,98.55) v1(29.97,16.13) v1(29.97,2.03) v1(30.23,38.1) v1(30.99,96.9) v1(32.51,85.09) v1(33.15,14.1) v1(33.27,116.46) v1(33.78,6.48) v1(34.67,38.1) v1(34.9,15.72) v1(35.05,2.03) v1(35.31,114.3) v1(36.45,77.17) v1(36.83,91.19) v1(37.34,125.98) v1(37.34,116.84) v1(37.33,49.91) v1(37.72,13.97) v1(38.23,20.57) v1(38.35,26.16) v1(38.35,24.26) v1(38.35,17.53) v1(39.12,38.1) v1(39.24,74.55) v1(40.01,111.76) v1(40.01,108.46) v1(40.13,116.2) v1(40.13,2.03) v1(40.89,25.78) v1(41.27,87.12) v1(42.04,75.92) v1(42.14,77.24) v1(42.29,13.34) v1(42.66,49.91) v1(42.82,62.94) v1(42.82,60.39) v1(42.82,57.15) v1(43.05,46.3) v1(43.05,15.62) v1(43.31,122.05) v1(43.56,38.1) v1(44.07,20.42) v1(44.32,83.82) v1(44.58,2.03) v1(44.7,24.89) v1(45.21,119.89) v1(45.34,12.45) v1(45.97,26.42) v1(46.23,113.28) v1(46.23,108.46) v1(47.12,28.07) v1(47.5,46.3) v1(47.62,49.78) v1(48.13,57.53) v1(48.16,56.32) v1(48.39,122.05) v1(48.39,28.07) v1(48.77,102.11) v1(48.9,71.34) v1(49.66,28.07) v1(49.76,62.94) v1(49.78,60.43) v1(50.04,23.62) v1(50.16,81.92) v1(50.29,77.6) v1(50.29,2.03) v1(50.8,20.19) v1(50.8,18.29) v1(50.93,37.57) v1(51.44,71.34) v1(52.07,67.16) v1(52.2,28.07) v1(52.2,24.26) v1(53.47,122.05) v1(53.47,117.6) v1(53.47,113.16) v1(53.47,108.08) v1(53.47,105.16) v1(53.47,23.11) v1(53.59,37.47) v1(54.09,45.63) v1(54.36,74.07) v1(54.74,50.8) v1(54.99,56.32) v1(54.99,53.77) v1(55.12,77.6) v1(55.12,20.57) v1(55.37,62.94) v1(56.01,37.57) v1(56.01,28.07) v1(56.13,44.96) v1(56.52,82.04) v1(56.64,16.64) v1(56.64,2.03) v1(56.77,97.41) v1(56.77,18.67) v1(56.9,67.08) v1(57.02,55.75) v1(57.15,71.34) v1(57.38,39.67) v1(57.78,60.43) v1(57.91,122.05) v1(57.91,117.6) v1(57.91,113.16) v1(57.91,108.08) v1(57.91,31.88) v1(58.17,77.6) v1(59.05,102.74) v1(59.05,97.28) v1(59.18,11.56) v1(59.18,6.48) v1(59.69,31.5) v1(59.82,28.07) v1(59.82,22.99) v1(60.54,50.14) v1(60.71,60.35) v1(60.83,67.16) v1(60.83,56.32) v1(60.83,53.75) v1(60.76,40.01) v1(60.83,31.5) v1(61.09,62.94) v1(61.09,45.56) v1(61.59,97.28) v1(61.72,2.03) v1(61.85,71.34) v1(61.85,50.16) v1(62.36,126.49) v1(62.36,122.05) v1(62.36,117.6) v1(62.36,113.16) v1(62.36,102.11) v1(62.36,35.05) v1(62.36,16.64) v1(62.61,82.04) v1(63.37,77.6) v1(63.75,56.01) v1(63.88,74.14) v1(64.14,97.41) v1(64.26,105.79) v1(64.26,101.09) v1(64.26,28.07) v1(64.64,23.24) v1(64.92,45.36) v1(65.02,32.51) v1(66.67,84.84) v1(66.8,126.49) v1(66.8,122.05) v1(66.8,117.6) v1(66.8,2.03) v1(67.18,97.66) v1(67.94,67.16) v1(68.15,35.53) v1(68.07,19.18) v1(68.07,16.64) v1(68.33,56.32) v1(68.45,53.75) v1(68.45,50.8) v1(68.58,62.94) v1(68.71,113.16) v1(68.71,108.71) v1(68.71,105.79) v1(68.96,60.43) v1(69.06,35.56) v1(69.98,32.51) v1(69.98,23.11) v1(69.98,11.56) v1(69.98,6.48) v1(70.23,82.3) v1(70.74,50.55) v1(70.87,101.47) v1(70.99,56.13) v1(71.25,122.05) v1(72.27,65.91) v1(72.52,2.03) v1(73.15,113.16) v1(73.15,108.71) v1(73.15,105.79) v1(73.41,56.26) v1(73.91,97.54) v1(74.04,101.09) v1(74.04,84.84) v1(74.04,50.42) v1(74.3,71.34) v1(74.3,62.94) v1(74.42,16.64) v1(75.06,31.88) v1(75.06,28.07) v1(75.06,23.11) v1(75.18,60.43) v1(75.95,13.97) v1(76.1,55.35) v1(76.33,97.54) v1(76.45,100.46) v1(76.45,82.3) v1(76.71,50.55) v1(76.96,121.41) v1(77.22,74.07) v1(77.6,105.79) v1(78.03,36.17) v1(78.49,116.46) v1(78.87,2.03) v1(79.14,49.26) v1(79.63,97.16) v1(79.69,66.1) v1(80.01,57.28) v1(80.14,31.88) v1(80.14,28.07) v1(80.14,23.11) v1(80.77,124.59) v1(80.87,63.66) v1(80.87,34.98) v1(81.49,60.75) v1(81.66,117.6) v1(81.66,110.49) v1(81.66,13.97) v1(82.55,24.38) v1(82.55,18.92) v1(82.68,100.2) v1(82.8,80.62) v1(83.31,33.15) v1(83.77,40.49) v1(83.95,87.88) v1(84.15,77.78) v1(84.45,16.81) v1(84.85,54.97) v1(85.09,27.43) v1(85.25,75.28) v1(85.22,7.11) v1(85.22,2.03) v1(85.34,22.48) v1(85.47,51.44) v1(86.11,81.79) v1(86.23,123.44) v1(86.44,42.52) v1(86.93,73.34) v1(87.35,39.55) v1(87.5,91.69) v1(87.5,16.66) v1(87.76,44.83) v1(87.98,70.77) v1(88.01,30.48) v1(88.32,85.14) v1(89.18,41.17) v1(89.55,68.8) v1(89.79,31.75) v1(90.07,42.49) v1(90.55,36.45) v1(90.73,16.61) v1(90.75,24.33) v1(91.06,48.9) v1(91.2,32.87) v1(92.2,2.03) v1(92.33,50.8) v1(92.46,60.58) v1(92.58,88.65) v1(92.56,38.84) v1(92.81,44.78) v1(92.94,83.39) v1(93.17,29.18) v1(93.55,56.08) v1(93.75,61.95) v1(94.11,10.92) v1(94.11,5.21) v1(94.36,120.78) v1(94.54,16.64) v1(94.61,50.67) v1(94.61,23.75) v1(94.69,83.34) v1(94.87,32.38) v1(94.87,28.96) v1(95.48,61.29) v1(95.5,48.39) v1(96.11,20.65) v1(96.48,38.15) v1(96.9,63.65) v1(97.16,123.19) v1(97.66,112.52) v1(97.82,56.54) v1(97.92,43.56) v1(98.42,61.01) v1(98.68,108.97) v1(98.68,68.12) v1(99.19,17.27) v1(99.31,57.53) v1(99.44,28.45) v1(99.95,116.33) v1(99.95,107.57) v1(99.94,63.02) v1(99.95,37.52) v1(100.61,43.61) v1(100.98,50.66) v1(101.35,48.01) v1(101.35,45.85) v1(101.73,24.26) v1(101.73,2.67) v1(101.98,57.53) v1(101.98,17.4) v1(102.11,46.38) v1(102.13,33.2) v1(102.23,110.74) v1(103.12,104.14) v1(103.3,69.52) v1(103.3,48.12) v1(103.63,119.63) v1(103.63,20.19) v1(103.63,5.84) v1(103.84,71.86) v1(104.17,56.14) v1(104.34,16.66) v1(104.52,47.12) v1(105.03,42.67) v1(105.41,112.39) v1(105.54,2.67) v1(106.3,42.29) v1(106.4,58.14) v1(106.81,120.65) v1(106.81,56.74) v1(107.44,116.59) v1(107.44,19.94) v1(107.95,33.27) v1(108.28,118.54) v1(109.22,32.64) v1(109.73,58.37) v1(109.98,5.84) v1(110.36,124.71) v1(110.95,10.13) v1(111.25,27.94) v1(111.25,2.67) v1(111.51,112.01) v1(111.63,50.55) v1(111.63,49.66) v1(111.92,29.8) v1(111.89,14.73) v1(112.27,24.38) v1(113.11,124.59) v1(113.49,95.02) v1(113.79,105.92) v1(113.81,47.18) v1(113.79,20.45) v1(114.11,48.32) v1(115.06,6.48) v1(115.19,27.81) v1(115.32,32.38) v1(115.44,36.83) v1(115.7,44.96) v1(115.7,2.67) v1(116.03,119.38) v1(116.2,111) v1(116.2,20.95) v1(116.41,51.02) v1(116.94,124.61) v1(116.89,70.76) v1(117.35,120.79) v1(117.6,46.03) v1(117.6,44.83) v1(117.78,69.72) v1(118.66,24.17) v1(118.87,36.96) v1(118.87,14.73) v1(119.13,27.81) v1(119.25,32.38) v1(119.58,48.31) v1(120.27,111.12) v1(120.78,10.29) v1(120.78,6.48) v1(120.78,2.67) v1(121.87,121.54) v1(122.22,58.14) v1(122.43,77.85) v1(122.53,56.21) v1(122.68,19.94) v1(122.68,15.37) v1(122.76,59.94) v1(123.44,104.27) v1(123.57,64.14) v1(123.7,55.24) v1(123.83,79.76) v1(123.95,58.17) v1(124.08,60.45) v1(124.21,73.03) v1(124.21,71.25) v1(124.21,61.59) v1(124.33,107.31) v1(124.46,16.64) v1(124.84,34.92) v1(125.48,105.03) v1(125.98,57.4) v1(126.21,13.64) v1(126.49,81.92) v1(126.49,6.48) v1(126.49,2.67) v1(127.13,29.34) v1(127.13,22.35) v1(127.38,107.31) v1(127.6,54.99) v1(128.27,50.8) v1(128.55,103.07) v1(128.78,124.08) v1(129.29,52.2) v1(129.92,64.64) v1(130.05,106.25) v1(129.96,57.35) v1(130.18,101.85) v1(131.19,75.95) v1(131.55,55.38) v1(132.49,103.12) v1(132.72,113.67) v1(132.72,38.73) v1(133.3,102.29) v1(133.27,55.47) v1(133.6,108.84) v1(133.86,86.74) v1(133.99,43.94) v1(134.24,115.95) v1(134.24,71.12) v1(134.49,106.93) v1(135,79.5) v1(135.47,72.22) v1(135.89,75.82) v1(137.54,51.18) v1(137.59,43.99) v1(138.05,45.97) v1(138.3,69.22) v1(138.43,113.79) v1(138.56,115.82) v1(139.32,35.43) v1(139.32,33.02) v1(139.7,51.05) v1(139.9,121.01) v1(139.95,76.58) v1(140.08,65.66) v1(140.21,43.94) v1(140.46,128.4) v1(140.46,124.46) v1(140.59,112.65) v1(140.84,115.95) v1(141.35,86.61) v1(141.35,51.05) v1(141.48,33.15) v1(141.99,78.74) v1(142.49,43.94) v1(142.62,110.03) v1(142.62,69.22) v1(142.7,86.21) v1(143.64,113.28) v1(143.76,105.66) v1(143.76,94.74) v1(144.91,75.56) v1(145.54,128.4) v1(145.54,124.46) v1(146.05,115.57) v1(146.05,65.79) v1(146.3,51.05) v1(147.07,107.7) v1(147.19,102.87) v1(147.19,87.63) v1(147.45,105.16) v1(147.37,96.85) v1(147.6,59.44) v1(147.8,74.75) v1(148.08,113.16) v1(148.79,60.91) v1(148.98,69.59) v1(149.45,120.42) v1(149.73,56.08) v1(149.73,51.05) v1(149.86,80.26) v1(149.86,70.87) v1(149.99,128.4) v1(149.99,124.46) v1(149.99,96.7) v1(150.37,87.63) v1(150.62,17.27) v1(150.62,7.75) v1(151.64,1.91) v1(151.89,65.79) v1(151.89,20.45) v1(152.02,71.12) v1(152.15,54.36) v1(152.27,41.78) v1(152.86,96.62) v1(152.91,43.56) v1(153.03,37.85) v1(153.29,101.98) v1(153.54,105.77) v1(153.54,33.15) v1(153.71,86.75) v1(153.75,13.56) v1(153.8,59.18) v1(153.8,23.62) v1(154.43,128.4) v1(154.43,124.46) v1(154.43,75.69) v1(154.69,51.31) v1(154.94,37.34) v1(155.07,28.19) v1(155.96,115.32) v1(156.34,71.88) v1(156.34,61.72) v1(156.34,57.53) v1(156.57,15.85) v1(156.84,68.2) v1(156.97,21.72) v1(157.1,42.55) v1(157.61,78.87) v1(157.99,87.25) v1(158.88,128.4) v1(158.88,124.46) v1(158.88,74.42) v1(158.88,64.26) v1(158.88,7.11) v1(159.26,1.91) v1(159.38,106.55) v1(159.51,70.61) v1(159.77,115.44) v1(160.02,57.28) v1(160.15,85.22) v1(160.27,61.34) v1(160.78,51.31) v1(160.78,16) v1(160.78,12.83) v1(160.91,53.59) v1(161.16,40.64) v1(161.29,101.35) v1(161.8,100.2) v1(161.93,43.56) v1(162.05,87.12) v1(162.05,77.6) v1(162.05,73.15) v1(162.31,115.44) v1(162.56,54.99) v1(162.74,101.12) v1(162.94,120.14) v1(163.32,128.4) v1(163.32,16) v1(163.58,124.71) v1(163.58,37.21) v1(163.7,42.04) v1(163.96,85.22) v1(164.08,61.34) v1(164.47,95.12) v1(165.35,58.04) v1(165.48,104.27) v1(165.61,106.93) v1(165.86,101.22) v1(165.86,19.18) v1(165.99,51.44) v1(166.12,87.25) v1(166.37,29.59) v1(166.62,61.85) v1(167,65.02) v1(167.51,124.84) v1(167.51,93.85) v1(167.64,72.39) v1(167.64,2.16) v1(167.77,128.4) v1(167.89,106.93) v1(168.15,85.22) v1(168.15,48.39) v1(168.28,98.42) v1(168.53,101.85) v1(169.67,113.79) v1(169.67,22.35) v1(169.67,19.18) v1(169.93,78.49) v1(170,57.15) v1(170.31,110.74) v1(170.43,102.74) v1(170.38,96.01) v1(170.43,43.94) v1(170.69,107.44) v1(170.94,65.02) v1(170.94,7.75) v1(171.27,87.35) v1(171.83,36.58) v1(171.96,92.08) v1(172.09,51.44) v1(172.31,115.47) v1(172.34,48.39) v1(172.37,126.31) v1(172.67,95.2) v1(173.23,32.89) v1(173.25,112.47) v1(173.25,96.82) v1(173.48,118.24) v1(173.61,92.08) v1(173.56,87.5) v1(173.61,79.5) v1(173.86,17.4) v1(173.86,13.46) v1(173.86,9.4) v1(174.88,43.56) v1(175.5,83.17) v1(175.95,112.88) v1(176.17,109.86) v1(176.28,41.91) v1(176.38,106.93) v1(176.4,32.51) v1(176.61,99.26) v1(176.73,116.23) v1(176.91,92.84) v1(176.91,24.13) v1(176.99,84.76) v1(177.22,72.24) v1(177.16,39.24) v1(177.29,20.45) v1(177.47,76.5) v1(177.72,104.44) v1(177.8,17.27) v1(177.93,113.79) v1(177.93,99.82) v1(178.05,30.1) v1(178.18,121.41) v1(178.31,34.29) v1(178.31,13.72) v1(178.31,9.65) v2(20.83,90.81)
